# Altium PCB SD171-5.0PCB4.PcbDoc (part 1 of 5)
Units mm, origin at the board's own origin, x right, y up, seen from the top; angles counter-clockwise.
Board outline 152.27 x 99.6 mm, 6 copper layers (Top Layer, InternalPlane1, Mid-Layer 1, Mid-Layer 2, InternalPlane2, Bottom Layer); 398 components, 338 nets, 1867 pads, 652 vias.
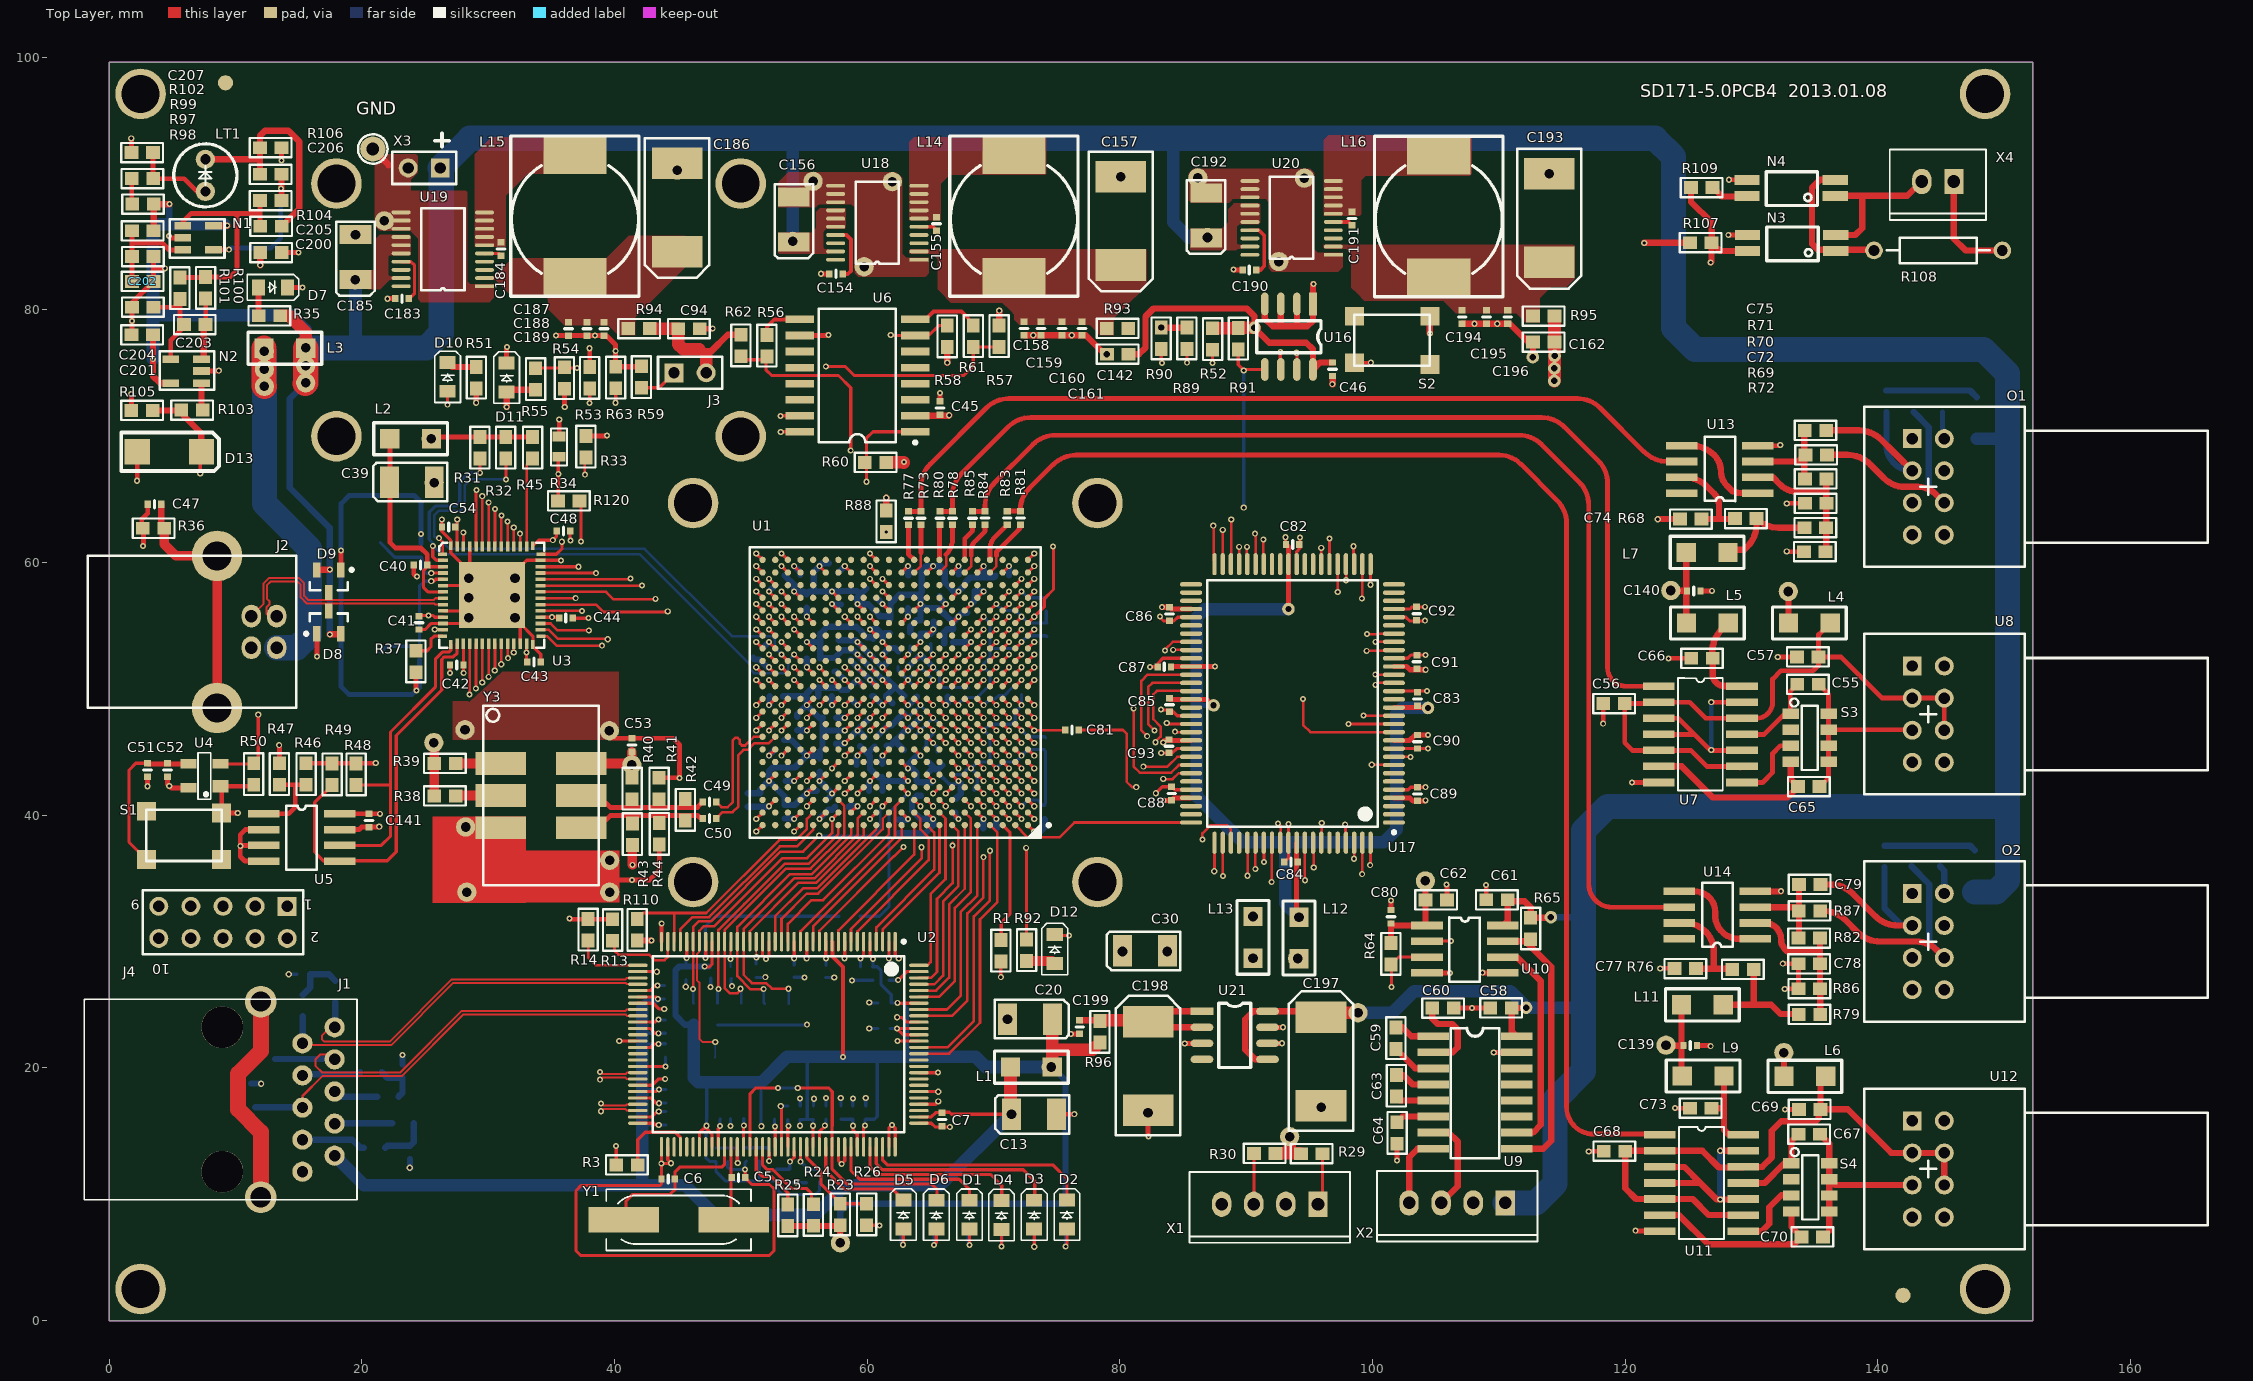
[diagram p0: Top Layer view]
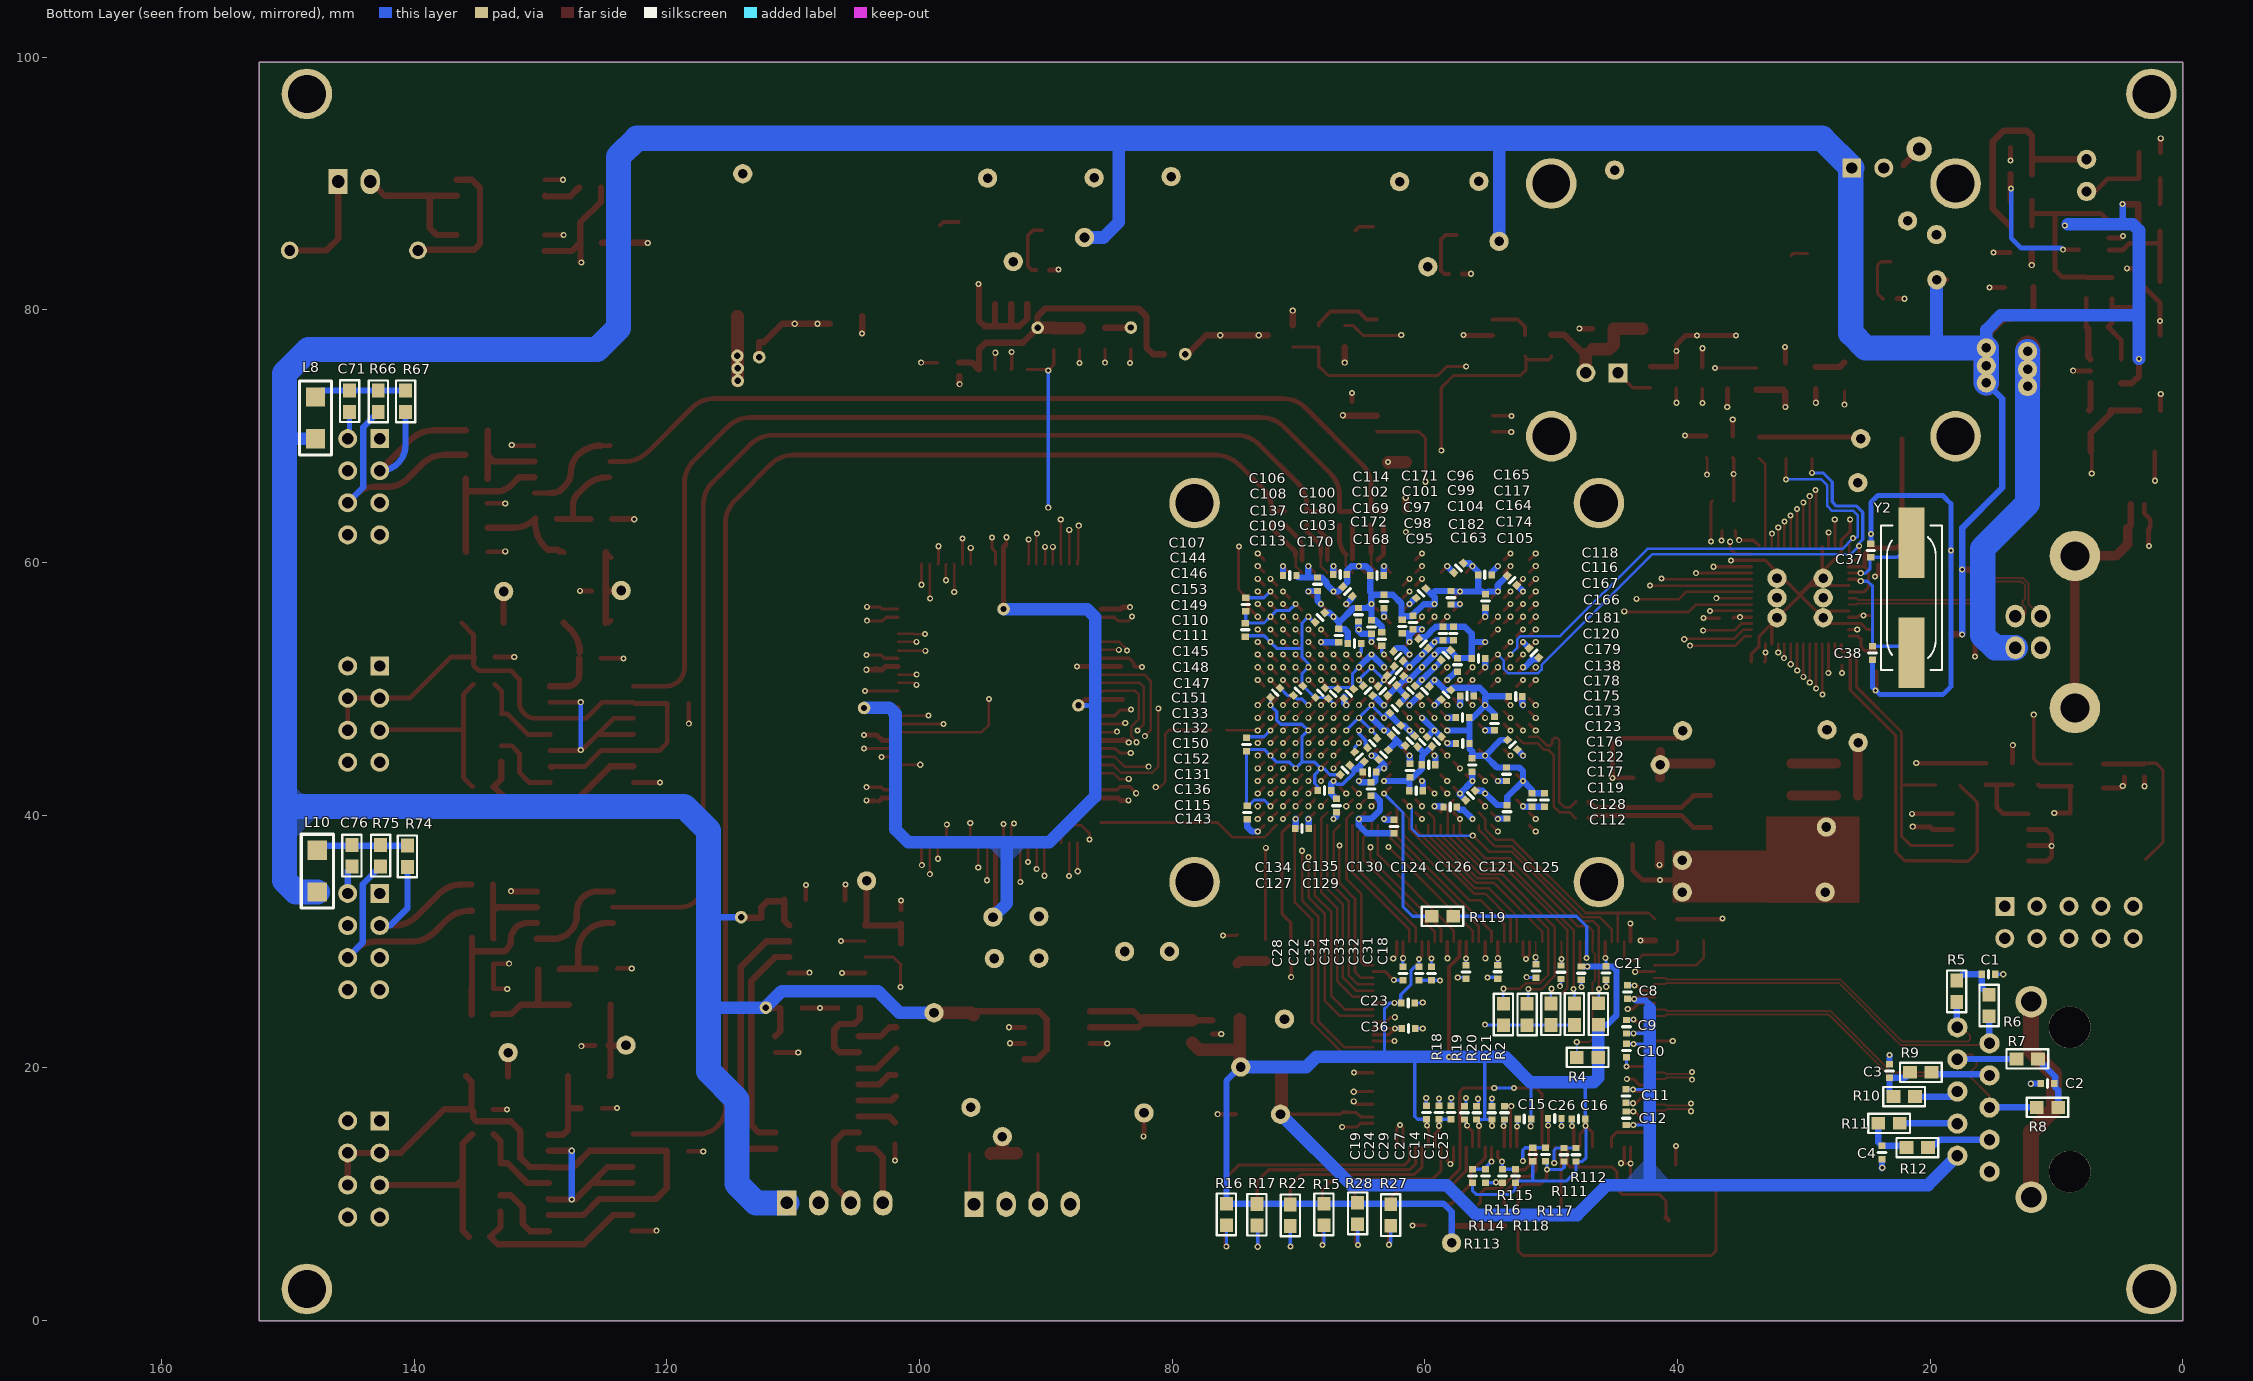
[diagram p1: Bottom Layer view, seen from below]
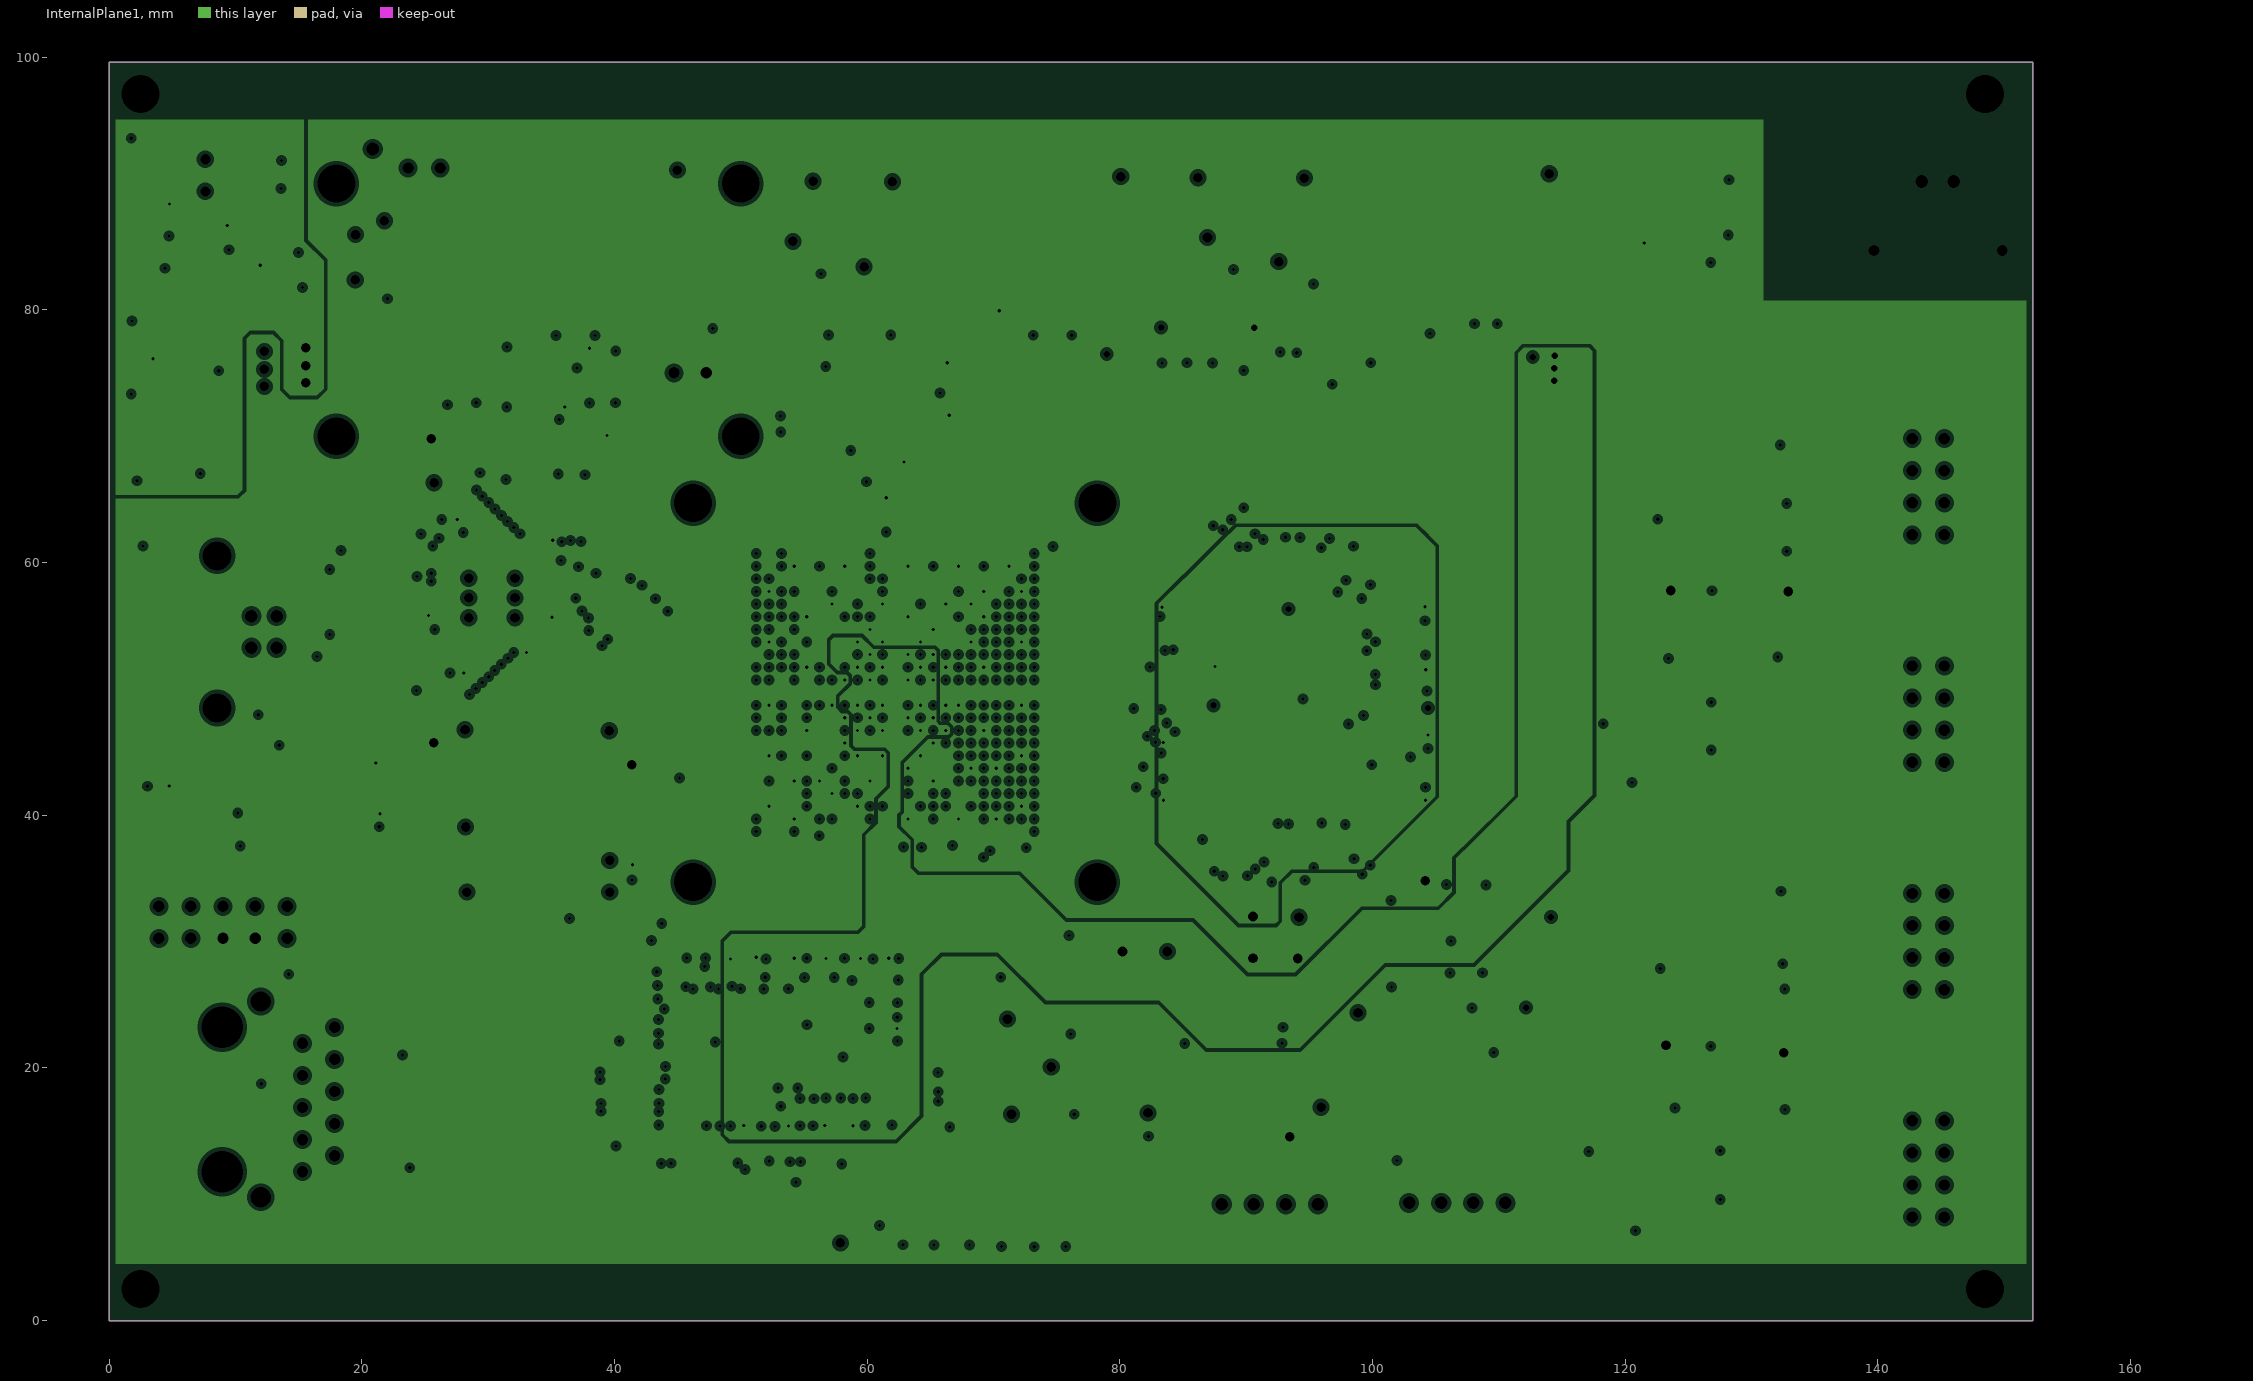
[diagram p2: InternalPlane1, clearances drawn from the general rule]
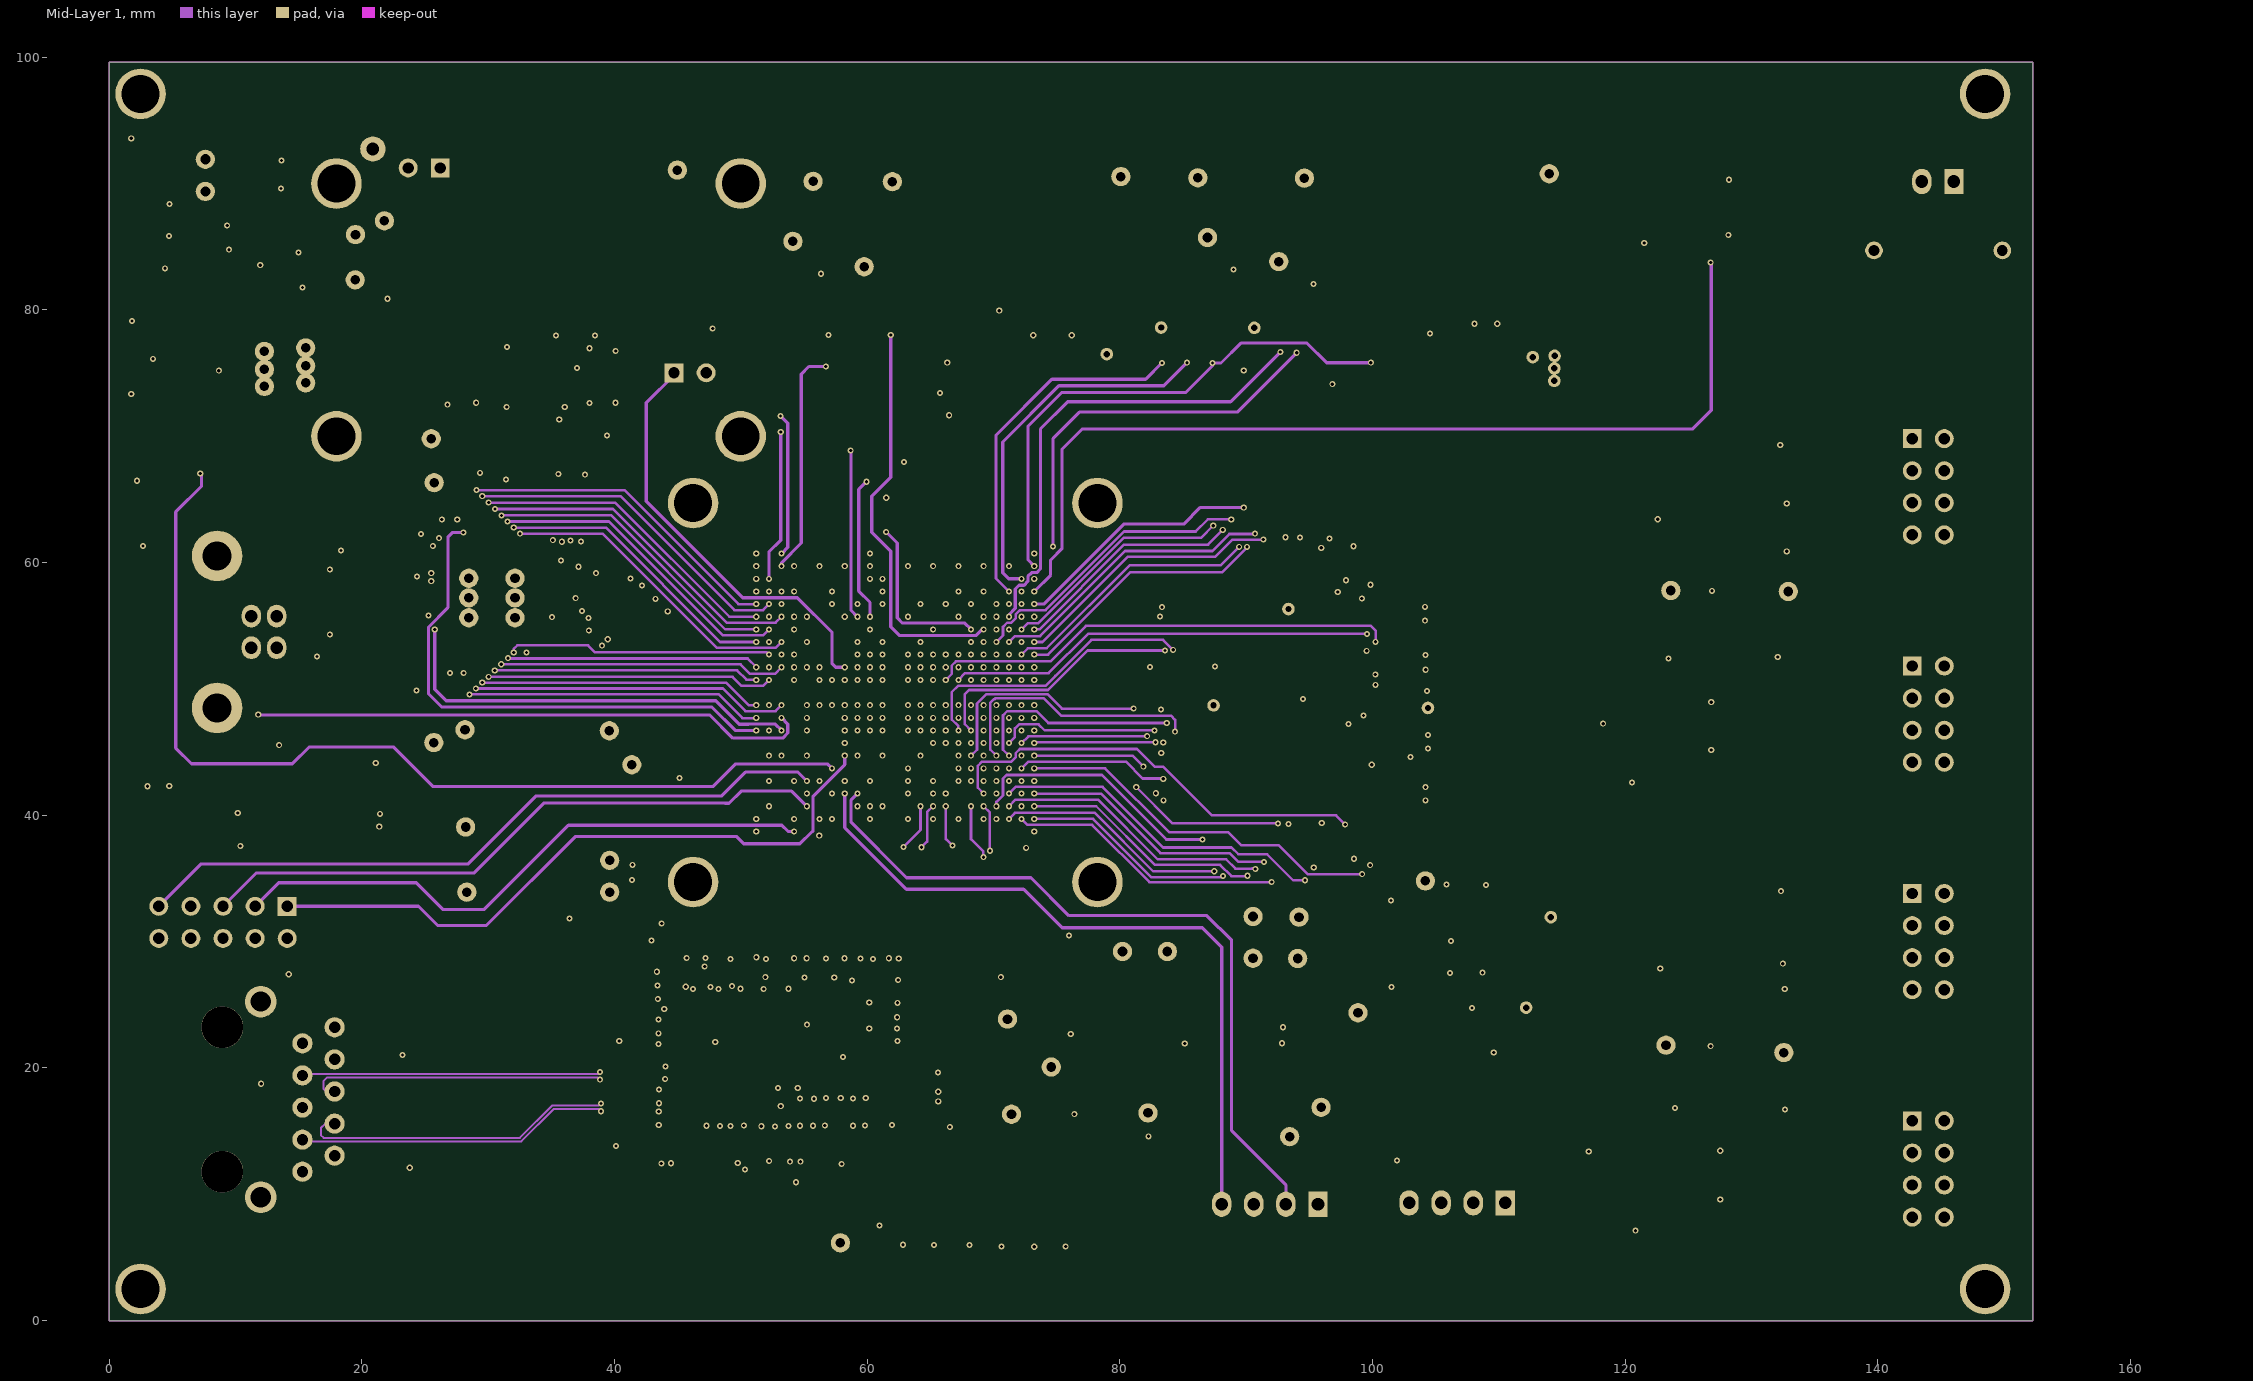
[diagram p3: Mid-Layer 1]
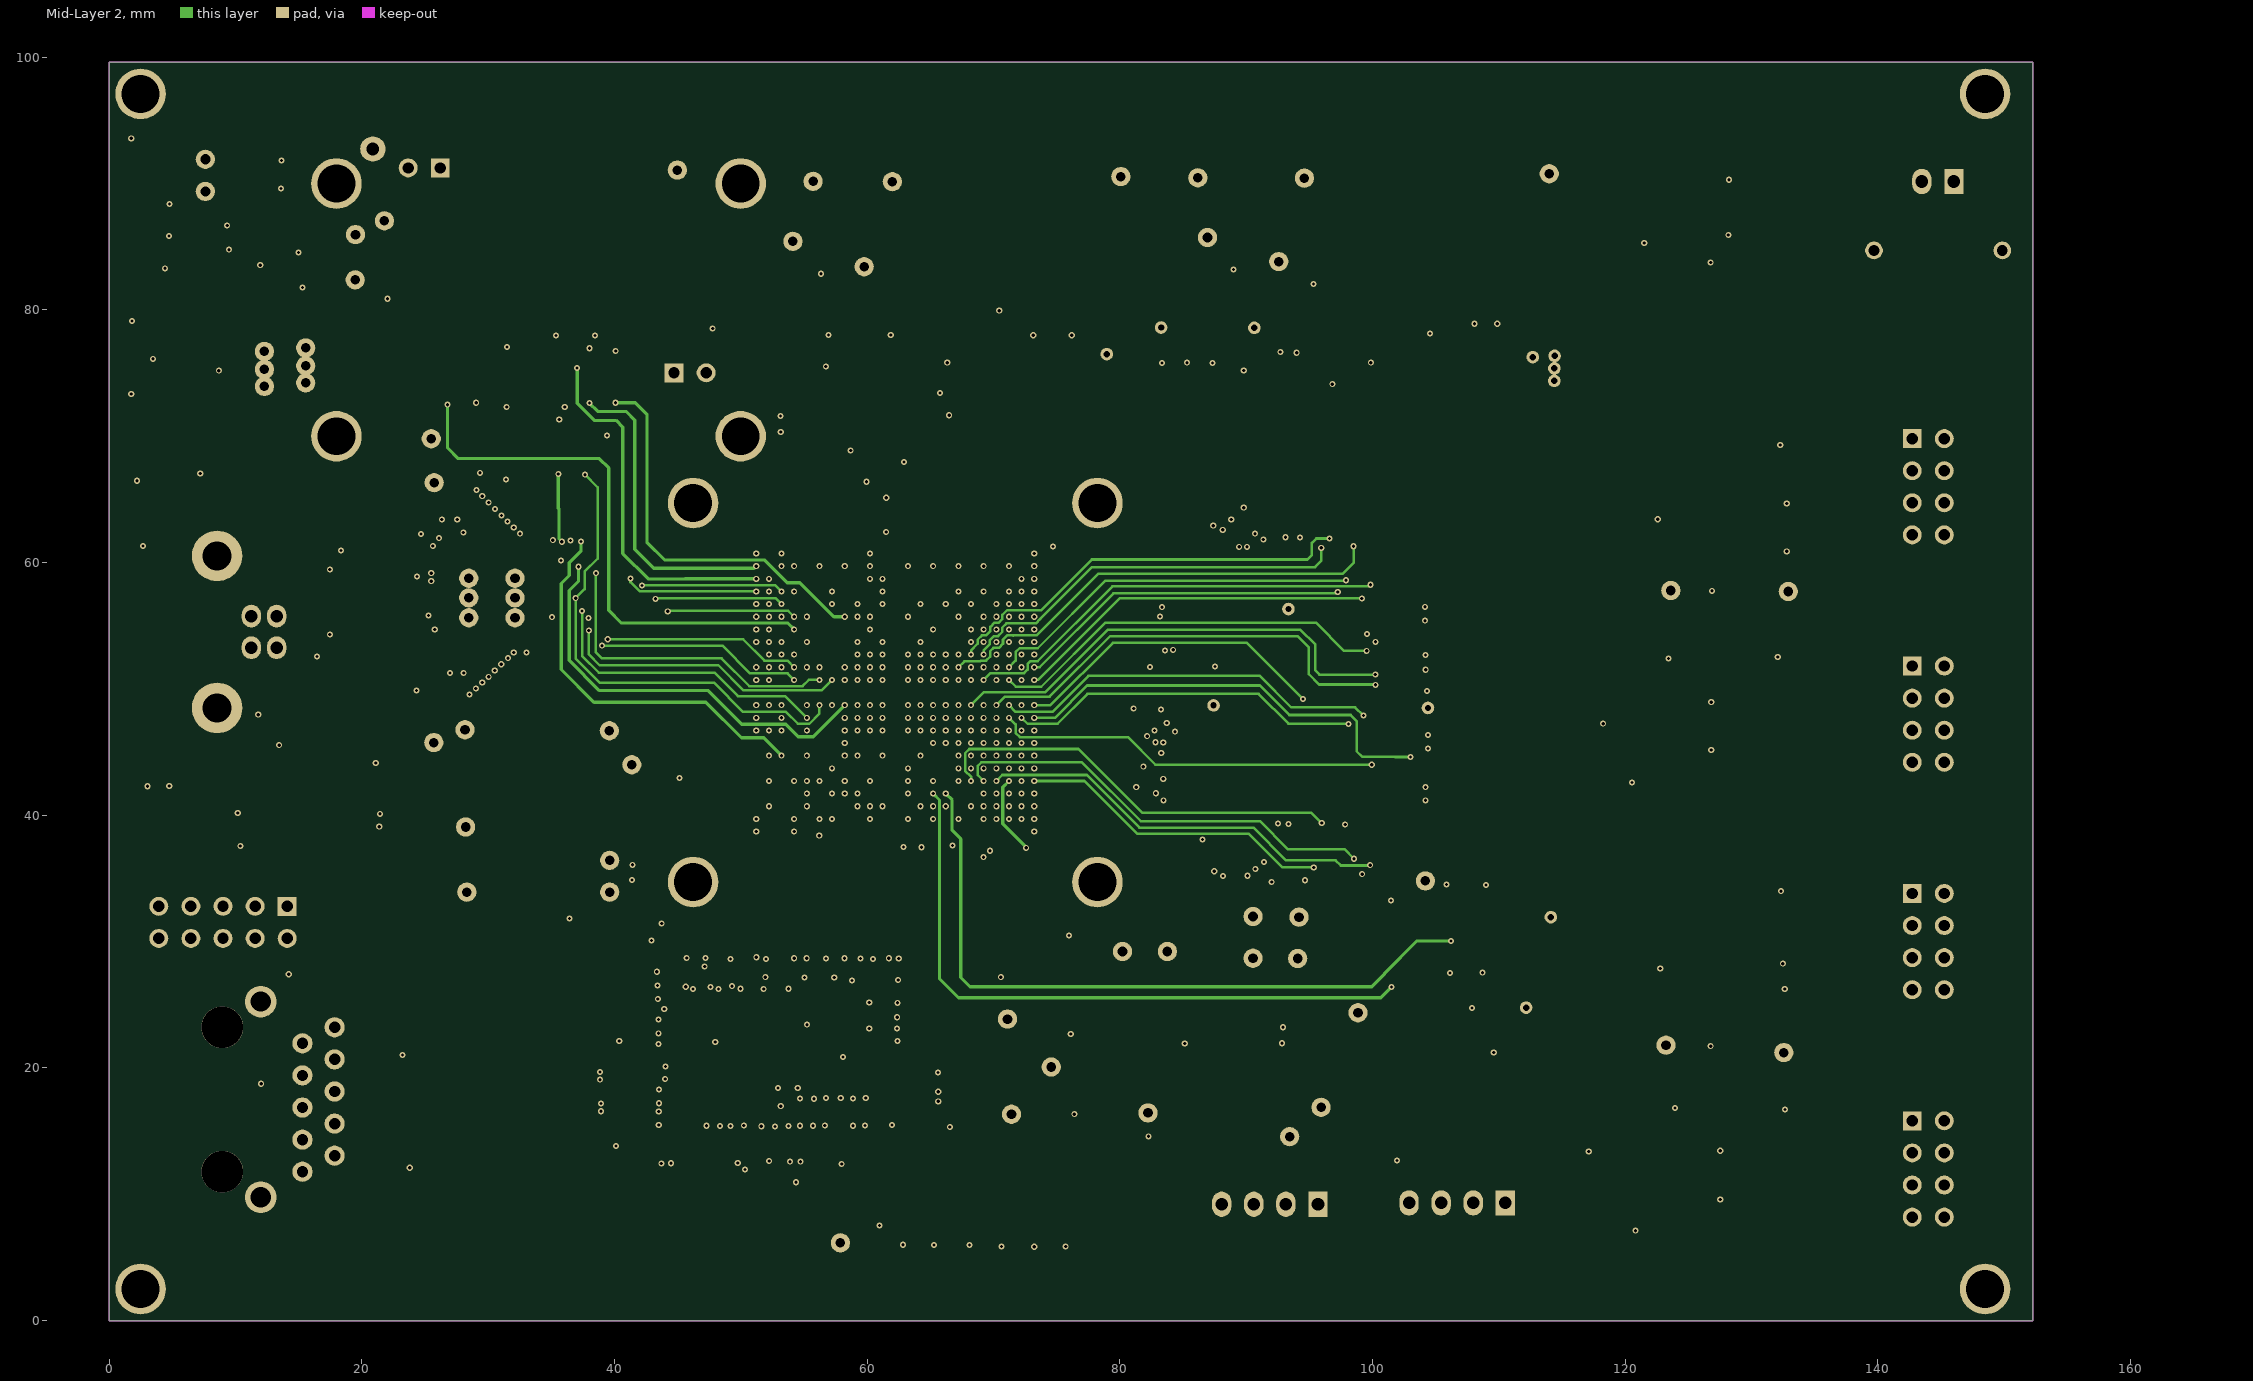
[diagram p4: Mid-Layer 2]
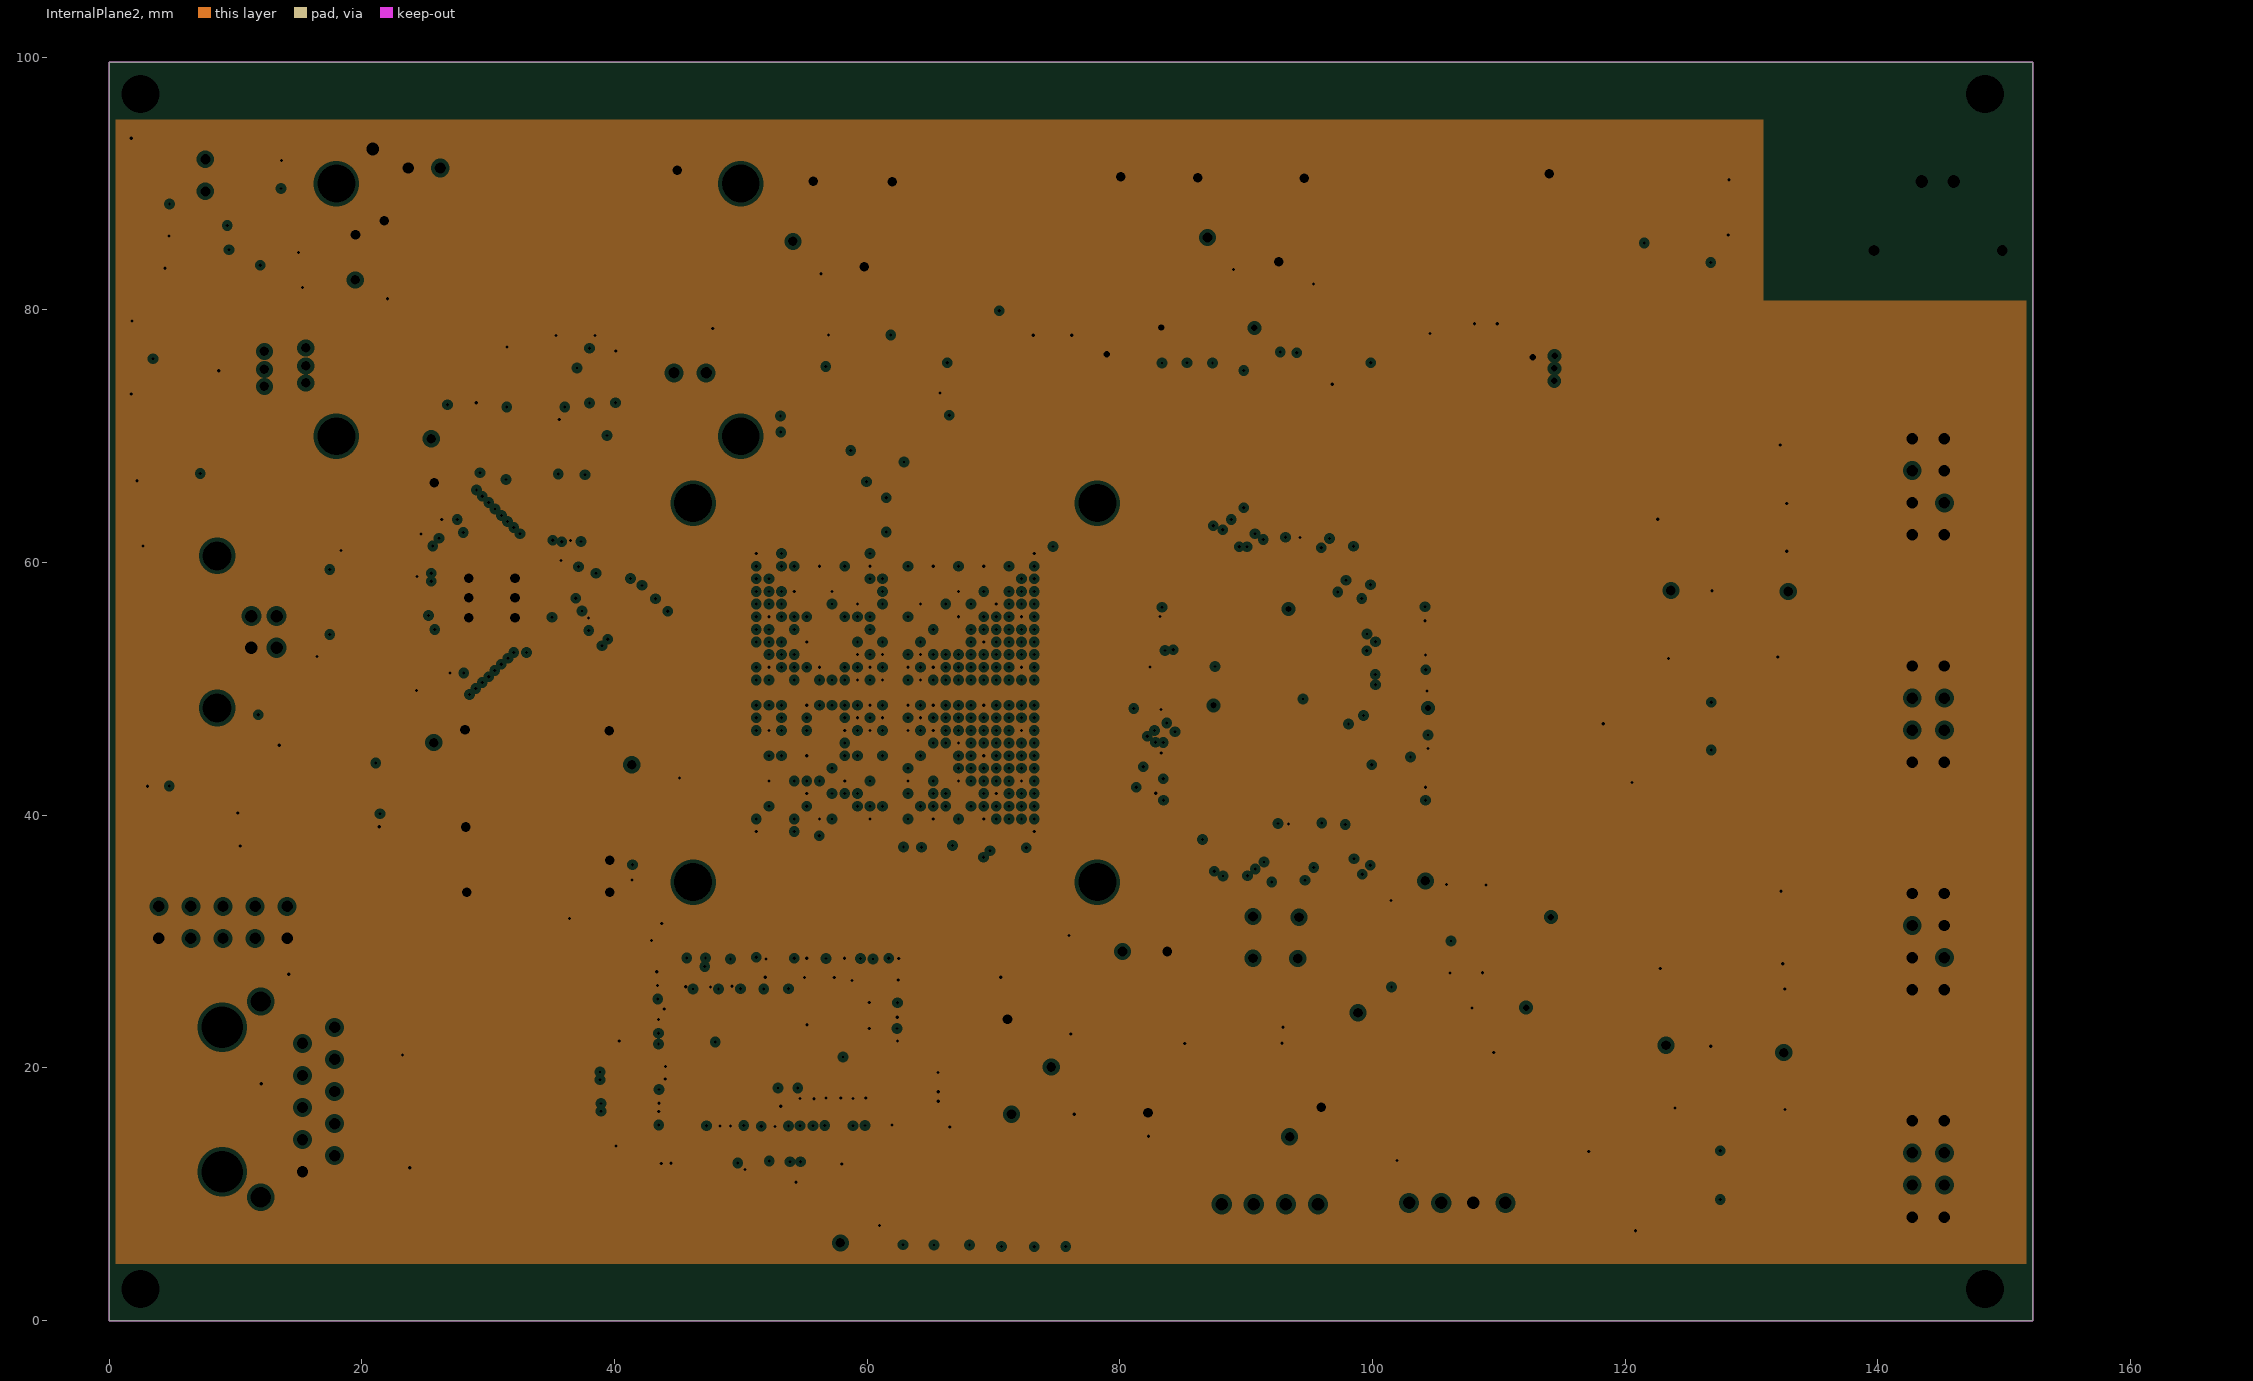
[diagram p5: InternalPlane2, clearances drawn from the general rule]

## Layer stack, top to bottom
Top Layer: signal copper 0.0356
Dielectric: prepreg 0.32, FR-4, Dk 4.8
InternalPlane1: plane copper 0.0356, net (Multiple Nets)
Dielectric: core 0.32, FR-4, Dk 4.8
Mid-Layer 1: signal copper 0.0356
Dielectric: prepreg 0.32, FR-4, Dk 4.8
Mid-Layer 2: signal copper 0.0356
Dielectric: core 0.32, FR-4, Dk 4.8
InternalPlane2: plane copper 0.0356, net GND
Dielectric: prepreg 0.32, FR-4, Dk 4.8
Bottom Layer: signal copper 0.0356

## Board outline
0,0 0,99.6 152.273,99.6 152.273,0 0,0

## Design rules (kind name [scope] priority, off if disabled: settings)
Clearance [All] p1: gap=0.127
DiffPairsRouting [All] p1: maxlimit=0.127 minlimit=0.127 mostfreqgap=0.127 maxuncoupledlength=12.7
FanoutControl Fanout_Default [All] p5: bgadir=NW bgaviamode=Centered fanoutstyle=Auto fanoutdirection=Alternating viagrid=0.025 // Fanout_Default (Default Rule)
Length "InNet('DDR2_DQ15') Or InNet('DDR2_DQ10')" [InNet('DDR2_DQ15') Or InNet('DDR2_DQ10')] p1: maxlimit=31.884 minlimit=0
Length "InNet('DDR2_DQ15') Or InNet('DDR2_LDQS_P')" [InNet('DDR2_DQ15') Or InNet('DDR2_LDQS_P')] p2: maxlimit=32.663 minlimit=0
MatchedLengths DiffPair_MatchedLengths [InDifferentialPair ('DDR2_UDQS')] p1: tolerance=25.4 checknetsindiffpair=TRUE checkdiffpairvsdiffpair=TRUE checkothers=TRUE
MatchedLengths DiffPair_MatchedLengths_1 [InDifferentialPair ('DDR2_CLK')] p2: tolerance=25.4 checknetsindiffpair=TRUE checkdiffpairvsdiffpair=TRUE checkothers=TRUE
MatchedLengths DiffPair_MatchedLengths_1_1 [InDifferentialPair ('TD3')] p3: tolerance=25.4 checknetsindiffpair=TRUE checkdiffpairvsdiffpair=TRUE checkothers=TRUE
MatchedLengths DiffPair_MatchedLengths_2 [InDifferentialPair ('TD2')] p4: tolerance=25.4 checknetsindiffpair=TRUE checkdiffpairvsdiffpair=TRUE checkothers=TRUE
MatchedLengths DiffPair_MatchedLengths_3 [InDifferentialPair ('TD1')] p5: tolerance=25.4 checknetsindiffpair=TRUE checkdiffpairvsdiffpair=TRUE checkothers=TRUE
MatchedLengths DiffPair_MatchedLengths_4 [InDifferentialPair ('TD0')] p6: tolerance=25.4 checknetsindiffpair=TRUE checkdiffpairvsdiffpair=TRUE checkothers=TRUE
MatchedLengths DiffPair_MatchedLengths_5 [InDifferentialPair ('D1')] p7: tolerance=25.4 checknetsindiffpair=TRUE checkdiffpairvsdiffpair=TRUE checkothers=TRUE
MatchedLengths DiffPair_MatchedLengths_6 [InDifferentialPair ('D1')] p8: tolerance=25.4 checknetsindiffpair=TRUE checkdiffpairvsdiffpair=TRUE checkothers=TRUE
MatchedLengths DiffPair_MatchedLengths_7 [InDifferentialPair ('DDR2_LDQS')] p9: tolerance=25.4 checknetsindiffpair=TRUE checkdiffpairvsdiffpair=TRUE checkothers=TRUE
MatchedLengths DiffPair_MatchedLengths_6_1 [InDifferentialPair ('DDR2_CLK')] p10: tolerance=25.4 checknetsindiffpair=TRUE checkdiffpairvsdiffpair=TRUE checkothers=TRUE
MatchedLengths DiffPair_MatchedLengths_5_1 [InDifferentialPair ('DDR2_CLK')] p11: tolerance=25.4 checknetsindiffpair=TRUE checkdiffpairvsdiffpair=TRUE checkothers=TRUE
MatchedLengths DiffPair_MatchedLengths_1_1_1 [InDifferentialPair ('DDR2_CLK')] p12: tolerance=25.4 checknetsindiffpair=TRUE checkdiffpairvsdiffpair=TRUE checkothers=TRUE
MatchedLengths DiffPair_MatchedLengths_2_1 [InDifferentialPair ('DDR2_LDQS')] p13: tolerance=25.4 checknetsindiffpair=TRUE checkdiffpairvsdiffpair=TRUE checkothers=TRUE
MatchedLengths DiffPair_MatchedLengths_3_1 [InDifferentialPair ('DDR2_CLK')] p14: tolerance=25.4 checknetsindiffpair=TRUE checkdiffpairvsdiffpair=TRUE checkothers=TRUE
MatchedLengths DiffPair_MatchedLengths_4_1 [InDifferentialPair ('TD0')] p15: tolerance=25.4 checknetsindiffpair=TRUE checkdiffpairvsdiffpair=TRUE checkothers=TRUE
MaxMinImpedance [All] p1: minimum=1.000 maximum=10.00
PlaneClearance [All] p1: clearance=0.3
PlaneConnect [All] p1: planeconnectstyle=Direct reliefexpansion=0.508 reliefentries=4 reliefconductorwidth=0.762 reliefairgap=0.254
PolygonConnect [All] p1: connectstyle=Direct reliefconductorwidth=0.254 reliefentries=4 polygonreliefangle="90 Angle"
RoutingVias [All] p1: holewidth=0.254 width=0.483 viastyle="Through Hole" minholewidth=0.254 minwidth=0.483 maxholewidth=0.254 maxwidth=0.483
SignalStimulus [All] p1: kind=1 level=0 starttime=5.000n stoptime=10.00n periodtime=10.00n
SilkscreenOverComponentPads [All] p1: minsilkscreentomaskgap=0.254
SolderMaskExpansion [All] p1: expansion=0.102
SupplyNets SupplyNets_5 [InNet('GND')] p1: voltage=0.000
SupplyNets SupplyNets_4 [InNet('VCC1V2')] p2: voltage=1.200
SupplyNets SupplyNets_3 [InNet('VCC1V8')] p3: voltage=1.800
SupplyNets SupplyNets_2 [InNet('VCC3V3')] p4: voltage=3.300
SupplyNets SupplyNets_1 [InNet('VCC5V')] p5: voltage=5.000
SupplyNets [InNet('VCC2V5')] p6: voltage=2.500
Width [All] p1: maxlimit=12.7 minlimit=0.127 preferedwidth=0.254
23 further rules are at their usual default settings.

## Classes and differential pairs
net class BNAK3: A0 A1 A2 A3 A4 A5 A6 A7 A8 A9 A10 A11 A12 A13 A14 A15 A16 A17 A18 ADV B4NC1 B4NC2 B4NC3 B4NC4 B4NC5 B4NC7 B4NC8 B4NC9 B4NC10 B4NC11 B4NC12 B4NC13 B4NC14 B4NC15 B4NC16 B4NC17 B4NC18 B4NC19 B4NC20 B4NC21 B4NC22 B4NC23 B4NC24 B4NC25 B4NC26 B4NC27 B4NC29 BA# BB# CK CKE# DA0 DA1 DA2 DA3 DA4 DA5 DA6 DA7 DA8 DB0 DB1 DB2 DB3 DB4 DB5 DB6 DB7 DB8 E1# E2 E3# EPSCLK EPSDA EPWP FJDQ1A FJDQ1B FJDQ2A FJDQ2B FPGA_ONCHIP_TERM1 FPGA_ONCHIP_TERM2 FT# G# GND LBO# NetD12_1 NetR92_1 TONGBU_E URXD W# ZZ
component class Sheet6: C200 C201 C202 C203 C204 C205 C206 C207 D13 LT1 N1 N2 N3 N4 R97 R98 R99 R100 R101 R102 R103 R104 R105 R106 R107 R108 R109 X4
component class Sheet1: C1 C2 C3 C4 C5 C6 C7 C8 C9 C10 C11 C12 C13 C14 C15 C16 C17 C18 C19 C20 C21 C22 C23 C24 C25 C26 C27 C28 C29 C30 C31 C32 C33 C34 C35 C36 D1 D2 D3 D4 D5 D6 D14 D15 D16 D17 D18 J1 L1 R1 R2 R3 R4 R5 R6 R7 R8 R9 R10 R11 R12 R13 R14 R15 R16 R17 R18 R19 R20 R21 R22 R23 R24 R25 R26 R27 R28 R29 R30 R110 R111 R112 R113 R114 R115 R116 R117 R118 R119 U1 U2 X1 Y1
component class Sheet2: C37 C38 C39 C40 C41 C42 C43 C44 C45 C46 C47 C48 C49 C50 C51 C52 C53 C219 C227 C228 C229 C230 C231 C232 D7 D8 D9 D10 J2 L2 L3 R31 R32 R33 R34 R35 R36 R37 R38 R39 R40 R41 R42 R43 R44 R45 R46 R47 R48 R49 R50 R51 R120 S1 U3 U4 U5 U23 Y2 Y3
component class Sheet3: C54 C55 C56 C57 C58 C59 C60 C61 C62 C63 C64 C65 C66 C67 C68 C69 C70 C71 C72 C73 C74 C75 C76 C77 C78 C79 C214 C215 C220 C221 C222 C223 C224 C225 C226 D11 J3 J4 L4 L5 L6 L7 L8 L9 L10 L11 O1 O2 R52 R53 R54 R55 R56 R57 R58 R59 R60 R61 R62 R63 R64 R65 R66 R67 R68 R69 R70 R71 R72 R73 R74 R75 R76 R77 R78 R79 R80 R81 R82 R83 R84 R85 R86 R87 R88 S2 S3 S4 U6 U7 U8 U9 U10 U11 U12 U13 U14 U22 X2
component class Sheet4: C80 C81 C82 C83 C84 C85 C86 C87 C88 C89 C90 C91 C92 C93 C218 D12 L12 L13 R89 R90 R91 R92 U16 U17
component class Sheet5: C94 C95 C96 C97 C98 C99 C100 C101 C102 C103 C104 C105 C106 C107 C108 C109 C110 C111 C112 C113 C114 C115 C116 C117 C118 C119 C120 C121 C122 C123 C124 C125 C126 C127 C128 C129 C130 C131 C132 C133 C134 C135 C136 C137 C138 C139 C140 C141 C142 C143 C144 C145 C146 C147 C148 C149 C150 C151 C152 C153 C154 C155 C156 C157 C158 C159 C160 C161 C162 C163 C164 C165 C166 C167 C168 C169 C170 C171 C172 C173 C174 C175 C176 C177 C178 C179 C180 C181 C182 C183 C184 C185 C186 C187 C188 C189 C190 C191 C192 C193 C194 C195 C196 C197 C198 C199 C208 C209 C210 C211 C212 C213 C216 C217 L14 L15 L16 R93 R94 R95 R96 U18 U19 U20 U21 X3
differential pair TD3: +TD3_P -TD3_N
differential pair TD2: +TD2_P -TD2_N
differential pair TD1: +TD1_P -TD1_N
differential pair TD0: +TD0_P -TD0_N
differential pair D1: +D1_P -D1_N

## Components (designator, comment, footprint, x,y, rotation, side; value= is the part's Value field where it differs from the comment)
C1 "220" 0402 14.877,27.411 r0 bottom
C2 "220" 0402 11.259,18.766 r180 bottom
C3 "220" 0402 23.226,20.285 r270 bottom
C4 "220" 0402 23.821,12.769 r90 bottom
C5 "220" 0402 50.346,11.307 r180 top
C6 "220" 0402 43.736,11.197 r0 top
C7 "104" 0402 65.943,15.389 r90 top
C8 "104" 0402 43.972,26.525 r270 bottom
C9 "104" 0402 44.048,23.782 r270 bottom
C10 "104" 0402 44.047,20.848 r90 bottom
C11 "104" 0402 44.072,17.241 r90 bottom
C12 "104" 0402 44.066,16.541 r270 bottom
C13 "10UF/20V" CAP-B 73.08,16.329 r180 top
C14 "104" 0402 55.902,16.973 r270 bottom
C15 "104" 0402 52.659,15.962 r180 bottom
C16 "104" 0402 48.366,15.962 r180 bottom
C17 "104" 0402 54.709,16.973 r270 bottom
C18 "104" 0402 47.628,26.969 r90 bottom
C19 "104" 0402 59.89,16.998 r270 bottom
C20 "10UF/20V" CAP-B 73.027,23.862 r0 top
C21 "104" 0402 45.672,26.994 r90 bottom
C22 "104" 0402 60.455,26.944 r90 bottom
C23 "104" 0402 60.802,25.143 r0 bottom
C24 "104" 0402 58.874,16.998 r270 bottom
C25 "104" 0402 53.718,16.973 r270 bottom
C26 "104" 0402 49.201,16 r0 bottom
C27 "104" 0402 56.868,16.973 r270 bottom
C28 "104" 0402 61.75,26.944 r90 bottom
C29 "104" 0402 57.934,16.998 r270 bottom
C30 "10UF/20V" CAP-B 81.876,29.259 r180 top
C31 "104" 0402 49.228,27.045 r90 bottom
C32 "104" 0402 51.215,27.156 r90 bottom
C33 "104" 0402 54.238,27.079 r90 bottom
C34 "104" 0402 56.747,27.071 r90 bottom
C35 "104" 0402 59.49,26.944 r90 bottom
C36 "104" 0402 60.776,23.111 r0 bottom
C37 "220" 0402 24.711,61.474 r270 bottom
C38 "220" 0402 24.565,52.318 r90 bottom
C39 "10UF/20V" CAP-B 23.837,66.369 r180 top
C40 "104" 0402 24.133,59.821 r0 top
C41 "104" 0402 24.533,54.707 r90 top
C42 "104" 0402 26.996,51.895 r0 top
C43 "104" 0402 34.167,52.143 r180 top
C44 "104" 0402 36.682,55.598 r180 top
C45 "104" 0402 65.771,72.751 r270 top
C46 "104" 0402 96.855,74.775 r90 top
C47 "104" 0402 4.119,64.615 r180 top
C48 "104" 0402 35.439,62.511 r0 top
C49 "104" 0402 47.011,41.049 r0 top
C50 "104" 0402 47.011,39.754 r0 top
C51 "104" 0402 3.051,44.099 r270 top
C52 "104" 0402 4.62,43.049 r90 top
C53 "104" 0402 41.38,46.08 r270 top
C54 "104" 0402 26.361,62.817 r0 top
C55 "101" 0603 134.472,50.365 r180 top
C56 "104" 0603 119.13,48.841 r180 top
C57 "103" 0603 134.463,52.53 r0 top
C58 "104" 0603 110.181,24.743 r0 top
C59 "104" 0603 101.857,22.356 r270 top
C60 "104" 0603 105.592,24.737 r180 top
C61 "104" 0603 109.858,33.304 r180 top
C62 "104" 0603 105.05,33.302 r0 top
C63 "104" 0603 101.902,18.588 r90 top
C64 "104" 0603 101.953,14.855 r90 top
C65 "101" 0603 134.548,42.263 r180 top
C66 "104" 0603 126.09,52.423 r180 top
C67 "101" 0603 134.574,14.754 r180 top
C68 "104" 0603 119.156,13.408 r180 top
C69 "103" 0603 134.616,16.716 r0 top
C70 "101" 0603 134.828,6.626 r180 top
C71 "104" 0603 145.121,72.777 r270 bottom
C72 "332" 0603 135.082,64.691 r180 top
C73 "104" 0603 125.988,16.812 r180 top
C74 "104" 0603 125.201,63.446 r180 top
C75 "332" 0603 135.073,70.463 r0 top
C76 "104" 0603 144.929,36.8 r270 bottom
C77 "104" 0603 124.769,27.861 r180 top
C78 "332" 0603 134.574,28.242 r180 top
C79 "332" 0603 134.616,34.522 r0 top
C80 "104" 0402 101.47,31.441 r90 top
C81 "104" 0402 75.694,46.748 r0 top
C82 "104" 0402 94.219,61.423 r180 top
C83 "104" 0402 103.565,49.721 r270 top
C84 "104" 0402 93.042,36.283 r0 top
C85 "104" 0402 83.925,48.214 r90 top
C86 "104" 0402 83.925,55.402 r90 top
C87 "104" 0402 83.001,51.75 r0 top
C88 "104" 0402 84.115,42.247 r270 top
C89 "104" 0402 103.565,42.203 r270 top
C90 "104" 0402 103.559,45.293 r90 top
C91 "104" 0402 103.514,52.667 r270 top
C92 "104" 0402 103.508,55.427 r90 top
C93 "104" 0402 83.899,44.937 r90 top
C94 "226" 0603 45.902,78.508 r180 top
C95 "104" 0402 55.784,59.033 r180 bottom
C96 "104" 0402 53.481,58.964 r225 bottom
C97 "104" 0402 57.934,57.74 r270 bottom
C98 "104" 0402 55.217,57.486 r270 bottom
C99 "104" 0402 50.998,52.475 r45 bottom
C100 "104" 0402 59.938,57.939 r315 bottom
C101 "104" 0402 56.966,59.946 r315 bottom
C102 "104" 0402 60.957,55.784 r270 bottom
C103 "104" 0402 61.795,55.454 r270 bottom
C104 "104" 0402 56.292,52.403 r180 bottom
C105 "104" 0402 57.426,52.431 r270 bottom
C106 "104" 0402 64.319,58.982 r180 bottom
C107 "104" 0402 70.174,58.976 r0 bottom
C108 "104" 0402 66.496,58.076 r225 bottom
C109 "104" 0402 65.275,56.394 r270 bottom
C110 "104" 0402 66.187,59.052 r0 bottom
C111 "104" 0402 68.501,58.807 r270 bottom
C112 "104" 0402 50.549,41.729 r270 bottom
C113 "104" 0402 66.824,54.743 r270 bottom
C114 "104" 0402 64.234,55.429 r270 bottom
C115 "104" 0402 65.653,49.989 r315 bottom
C116 "104" 0402 53.346,49.406 r180 bottom
C117 "104" 0402 56.154,49.425 r0 bottom
C118 "104" 0402 56.509,47.724 r0 bottom
C119 "104" 0402 54.48,47.783 r270 bottom
C120 "104" 0402 56.484,45.666 r0 bottom
C121 "104" 0402 60.229,43.996 r180 bottom
C122 "104" 0402 61.192,43.011 r90 bottom
C123 "104" 0402 53.443,45.955 r225 bottom
C124 "104" 0402 61.22,41.938 r180 bottom
C125 "104" 0402 56.258,44.507 r270 bottom
C126 "104" 0402 56.026,41.937 r315 bottom
C127 "104" 0402 53.489,40.798 r270 bottom
C128 "104" 0402 51.534,41.738 r270 bottom
C129 "104" 0402 53.54,43.77 r270 bottom
C130 "104" 0402 57.474,40.662 r0 bottom
C131 "104" 0402 62.462,38.577 r90 bottom
C132 "104" 0402 67.002,41.281 r270 bottom
C133 "104" 0402 69.209,38.961 r0 bottom
C134 "104" 0402 64.278,41.547 r90 bottom
C135 "104" 0402 64.91,43.438 r180 bottom
C136 "104" 0402 62.91,45.163 r315 bottom
C137 "104" 0402 63.243,57.435 r270 bottom
C138 "104" 0402 64.811,44.259 r45 bottom
C139 "104" 0402 125.684,21.765 r180 top
C140 "104" 0402 125.963,57.757 r180 top
C141 "104" 0402 20.571,39.061 r90 top
C142 "226" 0603 79.834,76.491 r0 top
C143 "104" 0402 70.415,49.478 r135 bottom
C144 "104" 0402 74.183,56.145 r90 bottom
C145 "104" 0402 67.937,56.028 r315 bottom
C146 "104" 0402 74.223,55.201 r270 bottom
C147 "104" 0402 67.914,50.065 r315 bottom
C148 "104" 0402 66.898,49.989 r315 bottom
C149 "104" 0402 74.122,46.134 r270 bottom
C150 "104" 0402 65.95,43.951 r315 bottom
C151 "104" 0402 74.068,39.702 r90 bottom
C152 "104" 0402 67.431,41.958 r0 bottom
C153 "104" 0402 71.482,50.069 r315 bottom
C154 "104" 0402 57.019,82.858 r0 top
C155 "473" 0402 65.508,87.337 r270 top
C156 "10UF/20V" CAP-B 54.207,87.025 r270 top
C157 "470UF/10V" CAP-D 80.089,87.05 r270 top
C158 "104" 0402 72.438,77.999 r90 top
C159 "104" 0402 73.784,77.999 r90 top
C160 "104" 0402 75.435,77.999 r90 top
C161 "102" 0402 77.01,77.999 r90 top
C162 "226" 0603 113.559,77.448 r0 top
C163 "104" 0402 58.569,54.921 r270 bottom
C164 "104" 0402 60.488,53.958 r225 bottom
C165 "104" 0402 57.967,53.045 r315 bottom
C166 "104" 0402 59.659,50.192 r315 bottom
C167 "104" 0402 62.486,52.965 r225 bottom
C168 "104" 0402 63.421,54.463 r270 bottom
C169 "104" 0402 66.097,53.597 r180 bottom
C170 "104" 0402 62.246,50.304 r45 bottom
C171 "104" 0402 62.962,49.465 r45 bottom
C172 "104" 0402 64.142,49.489 r45 bottom
C173 "104" 0402 57.957,49.913 r315 bottom
C174 "104" 0402 61.525,49.478 r135 bottom
C175 "104" 0402 59.442,45.464 r135 bottom
C176 "104" 0402 60.585,45.439 r135 bottom
C177 "104" 0402 61.551,45.516 r135 bottom
C178 "104" 0402 62.021,48.846 r315 bottom
C179 "104" 0402 64.547,45.337 r135 bottom
C180 "104" 0402 61.69,51.032 r45 bottom
C181 "104" 0402 62.657,46.348 r135 bottom
C182 "104" 0402 57.757,54.921 r270 bottom
C183 "104" 0402 22.658,80.885 r0 top
C184 "473" 0402 31.024,85.35 r270 top
C185 "10UF/20V" CAP-B 19.51,84.053 r270 top
C186 "470UF/10V" CAP-D 44.961,88.117 r270 top
C187 "104" 0402 36.37,77.974 r90 top
C188 "104" 0402 37.818,77.974 r90 top
C189 "104" 0402 39.164,77.974 r90 top
C190 "104" 0402 89.734,83.163 r0 top
C191 "473" 0402 98.385,87.763 r270 top
C192 "10UF/20V" CAP-B 86.846,87.355 r270 top
C193 "470UF/10V" CAP-D 113.998,87.279 r270 top
C194 "104" 0402 107.109,78.913 r90 top
C195 "104" 0402 109.039,78.913 r90 top
C196 "104" 0402 110.716,78.913 r90 top
C197 "470UF/10V" CAP-D 95.933,20.493 r90 top
C198 "470UF/10V" CAP-D 82.242,20.138 r90 top
C199 "104" 0402 76.832,22.703 r90 top
C200 "104" 0603 12.823,84.534 r0 top
C201 "104" 0603 2.621,78.026 r180 top
C202 "104" 0603 2.663,82.248 r0 top
C203 "103" 0603 6.786,78.839 r180 top
C204 "103" 0603 2.671,80.21 r180 top
C205 "105" 0603 12.823,86.617 r0 top
C206 "105" 0603 12.797,90.732 r0 top
C207 "104" 0603 2.621,92.453 r180 top
D1 "0805-LED" 0805LED 68.102,7.236 r90 top
D2 "0805-LED" 0805LED 75.823,7.261 r90 top
D3 "0805-LED" 0805LED 73.233,7.236 r90 top
D4 "0805-LED" 0805LED 70.642,7.211 r90 top
D5 "0805-LED" 0805LED 62.869,7.261 r90 top
D6 "0805-LED" 0805LED 65.486,7.236 r90 top
D7 "LED0" 0805LED 11.833,81.784 r0 top
D8 "BAT54S-SOT23" SOT23-3L 17.403,55.267 r90 top
D9 "BAT54S-SOT23" SOT23-3L 17.404,58.525 r270 top
D10 "LED0805" 0805LED 26.801,73.555 r90 top
D11 "LED(绿)" 0805LED 31.475,73.505 r90 top
D12 "红色 LED" 0805LED 74.858,28.267 r90 top
D13 "1N4728" M7 2.231,68.761 r0 top
J1 "HFJ11-1G01ERL" HFJ11-1G01ERL 8.962,17.504 r270 top
J2 "USB2.0" USB-B 8.555,60.531 r270 top
J3 "" HDR1X2 44.724,75.017 r0 top
J4 "FPGA_JTAG" HDR2X5 14.101,32.788 r180 top
L1 "10mH" 1206A 74.655,20.063 r180 top
L2 "磁珠" 1206A 22.228,69.804 r0 top
L3 "磁珠" 1206A 12.264,76.965 r0 top
L4 "磁珠" 1206A 132.939,55.223 r0 top
L5 "磁珠" 1206A 124.862,55.223 r0 top
L6 "磁珠" 1206A 132.584,19.332 r0 top
L7 "磁珠" 1206A 128.147,60.805 r180 top
L8 "磁珠" 1206A 147.825,73.097 r270 bottom
L9 "磁珠" 1206A 124.532,19.358 r0 top
L10 "磁珠" 1206A 147.673,37.232 r270 bottom
L11 "磁珠" 1206A 127.766,24.991 r180 top
L12 "10uH" 1206A 94.186,31.932 r270 top
L13 "10uH" 1206A 90.554,31.983 r270 top
L14 "5.6uH" L5R2 76.705,81.072 r90 top
L15 "5.6uH" L5R2 41.958,81.072 r90 top
L16 "5.6uH" L5R2 110.335,81.047 r90 top
LT1 "SFH203" LED5 7.624,89.38 r90 top
N1 "AD8541_1" SOT-23-5 6.092,86.668 r270 top
N2 "LMV7219M5" SOT-23-5 7.066,74.19 r90 top
N3 "TLP281-1(SOC4)" TLP821-1 136.682,84.655 r180 top
N4 "TLP281-1(SOC4)" TLP821-1 136.631,89.024 r180 top
O1 "HFBR-2416MZ/2412MZ" OPT 144,66 r90 top
O2 "HFBR-2416MZ/2412MZ" OPT 144,30 r90 top
R1 "101" 0603 70.591,29.283 r90 top
R2 "4751" 0603 46.274,24.26 r90 bottom
R3 "472" 0603 40.991,12.322 r0 top
R4 "4751" 0603 47.127,20.834 r0 bottom
R5 "470" 0603 17.911,26.057 r270 bottom
R6 "470" 0603 15.346,24.94 r270 bottom
R7 "470" 0603 12.322,20.705 r0 bottom
R8 "470" 0603 10.722,16.87 r0 bottom
R9 "470" 0603 20.749,19.655 r180 bottom
R10 "470" 0603 22.068,17.732 r180 bottom
R11 "470" 0603 23.263,15.617 r180 bottom
R12 "470" 0603 21.027,13.694 r180 bottom
R13 "472" 0603 39.856,30.916 r270 top
R14 "4991" 0603 37.925,30.942 r270 top
R15 "151" 0603 67.993,8.403 r270 bottom
R16 "151" 0603 75.714,8.403 r270 bottom
R17 "151" 0603 73.301,8.378 r270 bottom
R18 "472" 0603 53.794,24.227 r270 bottom
R19 "472" 0603 51.915,24.227 r270 bottom
R20 "472" 0603 50.035,24.253 r270 bottom
R21 "472" 0603 48.163,24.254 r270 bottom
R22 "151" 0603 70.66,8.327 r270 bottom
R23 "0" 0603 57.884,8.403 r90 top
R24 "0" 0603 55.756,8.361 r270 top
R25 "0" 0603 53.724,8.336 r270 top
R26 "0" 0603 59.966,8.403 r90 top
R27 "151" 0603 62.71,8.352 r270 bottom
R28 "151" 0603 65.326,8.479 r270 bottom
R29 "102" 0603 95.195,13.211 r0 top
R30 "102" 0603 91.47,13.23 r180 top
R31 "512" 0603 29.358,69.091 r270 top
R32 "512" 0603 31.397,69.092 r270 top
R33 "512" 0603 37.747,69.169 r270 top
R34 "105" 0603X 35.614,69.981 r270 top
R35 "103" 0603 12.696,79.53 r0 top
R36 "105" 0603 3.526,62.716 r0 top
R37 "103" 0603 24.285,52.176 r270 top
R38 "0" 0603 26.589,41.532 r0 top
R39 "0" 0603 26.589,44.097 r0 top
R40 "131" 0603 41.399,42.109 r90 top
R41 "820" 0603 43.54,42.11 r90 top
R42 "101" 0603 45.615,40.432 r90 top
R43 "131" 0603 41.424,38.502 r90 top
R44 "820" 0603 43.558,38.527 r90 top
R45 "103" 0603 33.531,69.092 r270 top
R46 "103" 0603 15.593,43.261 r90 top
R47 "103" 0603 13.484,43.261 r90 top
R48 "222" 0603 19.561,43.235 r270 top
R49 "222" 0603 17.656,43.235 r270 top
R50 "104" 0603 11.452,43.261 r90 top
R51 "27.4" 0603 29.068,74.631 r90 top
R52 "472" 0603 87.348,77.694 r90 top
R53 "472" 0603 38.046,74.621 r90 top
R54 "472" 0603 36.046,74.604 r270 top
R55 "511" 0603 33.76,74.528 r270 top
R56 "101" 0603 52.073,77.17 r270 top
R57 "102" 0603 70.457,77.923 r90 top
R58 "102" 0603 66.348,77.906 r270 top
R59 "472" 0603 42.142,74.68 r270 top
R60 "182" 0603 60.675,67.93 r0 top
R61 "101" 0603 68.407,77.924 r90 top
R62 "182" 0603 50.01,77.186 r90 top
R63 "0" 0603 40.104,74.646 r90 top
R64 "103" 0603 101.47,29.028 r90 top
R65 "103" 0603 112.519,31.034 r90 top
R66 "10R" 0603 142.847,72.767 r270 bottom
R67 "10R" 0603 140.688,72.767 r270 bottom
R68 "10R" 0603 129.561,63.478 r0 top
R69 "103" 0603 135.056,62.76 r180 top
R70 "222" 0603 135.082,66.621 r180 top
R71 "0R" 0603 135.125,68.525 r0 top
R72 "103" 0603 135.022,60.861 r0 top
R73 "33R1%" 0402 64.265,64.038 r270 top
R74 "10R" 0603 140.535,36.749 r270 bottom
R75 "10R" 0603 142.669,36.8 r270 bottom
R76 "10R" 0603 129.332,27.791 r0 top
R77 "33R1%" 0402 63.274,64.038 r270 top
R78 "33R1%" 0402 66.754,64.038 r270 top
R79 "103" 0603 134.599,24.229 r180 top
R80 "33R1%" 0402 65.764,64.038 r270 top
R81 "33R1%" 0402 72.132,64.063 r270 top
R82 "222" 0603 134.574,30.274 r180 top
R83 "33R1%" 0402 71.098,64.063 r270 top
R84 "33R1%" 0402 69.345,64.063 r270 top
R85 "33R1%" 0402 68.354,64.038 r270 top
R86 "103" 0603 134.59,26.267 r0 top
R87 "0R" 0603 134.599,32.433 r180 top
R88 "472" 0603 61.516,63.267 r90 top
R89 "100R" 0603 85.316,77.745 r90 top
R90 "DNP" 0603 83.284,77.745 r90 top
R91 "10K" 0603 89.387,77.721 r90 top
R92 "103" 0603 72.622,29.316 r270 top
R93 "0" 0603 79.828,78.54 r0 top
R94 "0" 0603 41.956,78.514 r0 top
R95 "0" 0603 113.559,79.505 r0 top
R96 "0" 0603 78.432,22.856 r90 top
R97 "512" 0603 2.663,86.261 r0 top
R98 "512" 0603 2.671,84.223 r180 top
R99 "0" 0603 2.688,88.37 r0 top
R100 "204" 0603 7.648,81.742 r270 top
R101 "204" 0603 5.616,81.716 r270 top
R102 "153" 0603 2.646,90.396 r180 top
R103 "512" 0603 6.574,72.063 r0 top
R104 "512" 0603 12.797,88.649 r0 top
R105 "103" 0603 2.612,72.037 r0 top
R106 "214" 0603 12.797,92.84 r0 top
R107 "512" 0603 125.988,85.316 r180 top
R108 "214" AXIAL-0.4 144.784,84.706 r180 top
R109 "0" 0603 126.065,89.684 r180 top
R110 "472" 0603 41.805,30.933 r90 top
R111 "0" 0402 48.98,12.601 r90 bottom
R112 "0" 0402 48.04,12.601 r90 bottom
R113 "0" 0402 56.245,10.925 r90 bottom
R114 "0" 0402 55.203,10.925 r90 bottom
R115 "0" 0402 52.841,10.925 r90 bottom
R116 "0" 0402 53.857,10.925 r90 bottom
R117 "0" 0402 50.453,12.627 r90 bottom
R118 "0" 0402 51.469,12.627 r90 bottom
R119 "0" 0603 58.61,32.002 r0 bottom
R120 "103" 0603 36.394,64.875 r0 top
S1 "复位按键" RESETKEY 8.918,40.441 r180 top
S2 "复位按键" RESETKEY 98.574,75.561 r0 top
S3 "47R-0805-阻排" RNS001 134.616,46.129 r270 top
S4 "47R-0805--阻排" RNS001 134.666,10.544 r270 top
U1 "XC6SLX45-3FGG484I" FGG484 62.233,49.712 r180 top
U2 "M88E1111-B2-RCJ1-C000" SQFP50P1720X2320-128L 52.98,21.872 r270 top
U3 "CY7C68014A-56LFXC" LF56A_N 30.299,57.425 r0 top
U4 "IMP811REUS-T" SOT-143 8.818,42.288 r90 top
U5 "24LC64" SMD8XX 11.095,35.665 r0 top
U6 "M25P64-VMF" SOIC16 63.809,70.355 r90 top
U7 "SN74LVC00AD" SMD14X 122.654,50.211 r0 top
U8 "HFBR-1414MZ  TX" OPT 144,48 r90 top
U9 "MAX232A" SMD16XX 102.537,10.181 r0 top
U10 "ADUM1201" SMD8XX 103.17,26.825 r0 top
U11 "SN74LVC00AD" SMD14X 122.755,14.702 r0 top
U12 "HFBR-1414MZ   TX" OPT 144,12 r90 top
U13 "MAX997ESA" SMD8XX 131.653,69.949 r180 top
U14 "MAX997ESA" SMD8XX 131.449,34.668 r180 top
U16 "FM24CL04" so_8 95.296,80.47 r270 top
U17 "GS880Z18T-100" QFP65P1680X2280-100N 93.678,48.849 r180 top
U18 "TPS54314" SOP20 64.113,83.977 r180 top
U19 "TPS54316" SOP20 29.721,81.869 r180 top
U20 "TPS54312" SOP20 96.904,84.358 r180 top
U21 "LT1963ES8-2.5" so_8 86.509,24.481 r0 top
X1 "4PIN-2.54" SIP4X 95.712,9.217 r180 top
X2 "4PIN-2.54" SIP4X 110.545,9.319 r180 top
X3 "Header 2" HDR1X2 26.217,91.234 r180 top
X4 "Header 2" SIP2X 146.029,90.167 r180 top
Y1 "25.000MHz" CRYSTAL_2 49.433,7.973 r180 top
Y2 "24.000MHz" CRYSTAL_2 21.491,52.874 r90 bottom
Y3 "OCS7050(LVPECL)-3.3V-100M-20PPM" CCPD-940X-033 34.191,41.559 r270 top

## Footprints (in the part's own frame and the unit in brackets; to place one, negate y for a bottom-side part, rotate by r counter-clockwise, add the part's x,y. Pads: shape width x height; smd on the part's side, far side on the other; paste and mask are expansions set on the pad)
0402 [mil]
  rect 20x22 smd: 1(-0.3,-0.02) 2(41.7,-0.02)
  silkscreen extent 21,-12 21,12
0603 [mil]
  rect 43x40 smd: 1(-33.5,0) 2(33.5,0)
  silkscreen extent -65,-30 65,30
0603X [mm]
  rect 0.762x1 smd: 1(0,0) 2(1.6,0)
  silkscreen extent -0.64,-0.64 2.29,0.64
0805LED [mil]
  rect 40x50 smd: 1(0,0) 2(90,0)
  silkscreen extent -35,-40 125,40
1206A [mil]
  rect 60x60 smd: 1(0,0) 2(130,0)
  silkscreen extent -50,-50 180,50
AXIAL-0.4 [mm]
  round 1.4 hole 0.85: 1(-5.08,0) 2(5.08,0)
  silkscreen extent -4.06,-1.02 4.06,1.02
CAP-B [mm]
  rect 1.5x2.5 smd: 1(1.651,0) 2(-1.905,0)
  silkscreen extent -2.92,-1.52 2.92,1.52
CAP-D [mm]
  rect 2.5x4 smd: 1(3.5,0) 2(-3.5,0)
  silkscreen extent -5.46,-2.54 5.59,2.54
CCPD-940X-033 [mm]
  rect 1.8x4 smd: 1(-2.54,-3.2) 2(0,-3.2) 3(2.54,-3.2) 4(2.54,3.2) 5(0,3.2) 6(-2.54,3.2)
  silkscreen extent -7.1,-4.57 7.1,4.57
CRYSTAL_2 [mil]
  rect 220x80 smd: 1(0,0) 2(342.52,0)
  silkscreen extent -54,-95 397,95
FGG484 [mm] "BGA, 484-Leads, Body 23x23mm, Pitch 1mm"
  round 0.5 smd: A1(-10.5,10.5) A2(-9.5,10.5) A3(-8.5,10.5) A4(-7.5,10.5) A5(-6.5,10.5) A6(-5.5,10.5) A7(-4.5,10.5) A8(-3.5,10.5) A9(-2.5,10.5) A10(-1.5,10.5) A11(-0.5,10.5) A12(0.5,10.5) A13(1.5,10.5) A14(2.5,10.5) A15(3.5,10.5) A16(4.5,10.5) A17(5.5,10.5) A18(6.5,10.5) A19(7.5,10.5) A20(8.5,10.5) A21(9.5,10.5) A22(10.5,10.5) AA1(-10.5,-9.5) AA2(-9.5,-9.5) AA3(-8.5,-9.5) AA4(-7.5,-9.5) AA5(-6.5,-9.5) AA6(-5.5,-9.5) AA7(-4.5,-9.5) AA8(-3.5,-9.5) AA9(-2.5,-9.5) AA10(-1.5,-9.5) AA11(-0.5,-9.5) AA12(0.5,-9.5) AA13(1.5,-9.5) AA14(2.5,-9.5) AA15(3.5,-9.5) AA16(4.5,-9.5) AA17(5.5,-9.5) AA18(6.5,-9.5) AA19(7.5,-9.5) AA20(8.5,-9.5) AA21(9.5,-9.5) AA22(10.5,-9.5) AB1(-10.5,-10.5) AB2(-9.5,-10.5) AB3(-8.5,-10.5) AB4(-7.5,-10.5) AB5(-6.5,-10.5) AB6(-5.5,-10.5) AB7(-4.5,-10.5) AB8(-3.5,-10.5) AB9(-2.5,-10.5) AB10(-1.5,-10.5) AB11(-0.5,-10.5) AB12(0.5,-10.5) AB13(1.5,-10.5) AB14(2.5,-10.5) AB15(3.5,-10.5) AB16(4.5,-10.5) AB17(5.5,-10.5) AB18(6.5,-10.5) AB19(7.5,-10.5) AB20(8.5,-10.5) AB21(9.5,-10.5) AB22(10.5,-10.5) B1(-10.5,9.5) B2(-9.5,9.5) B3(-8.5,9.5) B4(-7.5,9.5) B5(-6.5,9.5) B6(-5.5,9.5) B7(-4.5,9.5) B8(-3.5,9.5) B9(-2.5,9.5) B10(-1.5,9.5) B11(-0.5,9.5) B12(0.5,9.5) B13(1.5,9.5) B14(2.5,9.5) B15(3.5,9.5) B16(4.5,9.5) B17(5.5,9.5) B18(6.5,9.5) B19(7.5,9.5) B20(8.5,9.5) B21(9.5,9.5) B22(10.5,9.5) C1(-10.5,8.5) C2(-9.5,8.5) C3(-8.5,8.5) C4(-7.5,8.5) C5(-6.5,8.5) C6(-5.5,8.5) C7(-4.5,8.5) C8(-3.5,8.5) C9(-2.5,8.5) C10(-1.5,8.5) C11(-0.5,8.5) C12(0.5,8.5) C13(1.5,8.5) C14(2.5,8.5) C15(3.5,8.5) C16(4.5,8.5) C17(5.5,8.5) C18(6.5,8.5) C19(7.5,8.5) C20(8.5,8.5) C21(9.5,8.5) C22(10.5,8.5) D1(-10.5,7.5) D2(-9.5,7.5) D3(-8.5,7.5) D4(-7.5,7.5) D5(-6.5,7.5) D6(-5.5,7.5) D7(-4.5,7.5) D8(-3.5,7.5) D9(-2.5,7.5) D10(-1.5,7.5) D11(-0.5,7.5) D12(0.5,7.5) D13(1.5,7.5) D14(2.5,7.5) D15(3.5,7.5) D16(4.5,7.5) D17(5.5,7.5) D18(6.5,7.5) D19(7.5,7.5) D20(8.5,7.5) D21(9.5,7.5) D22(10.5,7.5) E1(-10.5,6.5) E2(-9.5,6.5) E3(-8.5,6.5) E4(-7.5,6.5) E5(-6.5,6.5) E6(-5.5,6.5) E7(-4.5,6.5) E8(-3.5,6.5) E9(-2.5,6.5) E10(-1.5,6.5) E11(-0.5,6.5) E12(0.5,6.5) E13(1.5,6.5) E14(2.5,6.5) E15(3.5,6.5) E16(4.5,6.5) E17(5.5,6.5) E18(6.5,6.5) E19(7.5,6.5) E20(8.5,6.5) E21(9.5,6.5) E22(10.5,6.5) F1(-10.5,5.5) F2(-9.5,5.5) F3(-8.5,5.5) F4(-7.5,5.5) F5(-6.5,5.5) F6(-5.5,5.5) F7(-4.5,5.5) F8(-3.5,5.5) F9(-2.5,5.5) F10(-1.5,5.5) F11(-0.5,5.5) F12(0.5,5.5) F13(1.5,5.5) F14(2.5,5.5) F15(3.5,5.5) F16(4.5,5.5) F17(5.5,5.5) F18(6.5,5.5) F19(7.5,5.5) F20(8.5,5.5) F21(9.5,5.5) F22(10.5,5.5) G1(-10.5,4.5) G2(-9.5,4.5) G3(-8.5,4.5) G4(-7.5,4.5) G5(-6.5,4.5) G6(-5.5,4.5) G7(-4.5,4.5) G8(-3.5,4.5) G9(-2.5,4.5) G10(-1.5,4.5) G11(-0.5,4.5) G12(0.5,4.5) G13(1.5,4.5) G14(2.5,4.5) G15(3.5,4.5) G16(4.5,4.5) G17(5.5,4.5) G18(6.5,4.5) G19(7.5,4.5) G20(8.5,4.5) G21(9.5,4.5) G22(10.5,4.5) H1(-10.5,3.5) H2(-9.5,3.5) H3(-8.5,3.5) H4(-7.5,3.5) H5(-6.5,3.5) H6(-5.5,3.5) H7(-4.5,3.5) H8(-3.5,3.5) H9(-2.5,3.5) H10(-1.5,3.5) H11(-0.5,3.5) H12(0.5,3.5) H13(1.5,3.5) H14(2.5,3.5) H15(3.5,3.5) H16(4.5,3.5) H17(5.5,3.5) H18(6.5,3.5) H19(7.5,3.5) H20(8.5,3.5) H21(9.5,3.5) H22(10.5,3.5) J1(-10.5,2.5) J2(-9.5,2.5) J3(-8.5,2.5) J4(-7.5,2.5) J5(-6.5,2.5) J6(-5.5,2.5) J7(-4.5,2.5) J8(-3.5,2.5) J9(-2.5,2.5) J10(-1.5,2.5) J11(-0.5,2.5) J12(0.5,2.5) J13(1.5,2.5) J14(2.5,2.5) J15(3.5,2.5) J16(4.5,2.5) J17(5.5,2.5) J18(6.5,2.5) J19(7.5,2.5) J20(8.5,2.5) J21(9.5,2.5) J22(10.5,2.5) K1(-10.5,1.5) K2(-9.5,1.5) K3(-8.5,1.5) K4(-7.5,1.5) K5(-6.5,1.5) K6(-5.5,1.5) K7(-4.5,1.5) K8(-3.5,1.5) K9(-2.5,1.5) K10(-1.5,1.5) K11(-0.5,1.5) K12(0.5,1.5) K13(1.5,1.5) K14(2.5,1.5) K15(3.5,1.5) K16(4.5,1.5) K17(5.5,1.5) K18(6.5,1.5) K19(7.5,1.5) K20(8.5,1.5) K21(9.5,1.5) K22(10.5,1.5) L1(-10.5,0.5) L2(-9.5,0.5) L3(-8.5,0.5) L4(-7.5,0.5) L5(-6.5,0.5) L6(-5.5,0.5) L7(-4.5,0.5) L8(-3.5,0.5) L9(-2.5,0.5) L10(-1.5,0.5) L11(-0.5,0.5) L12(0.5,0.5) L13(1.5,0.5) L14(2.5,0.5) L15(3.5,0.5) L16(4.5,0.5) L17(5.5,0.5) L18(6.5,0.5) L19(7.5,0.5) L20(8.5,0.5) L21(9.5,0.5) L22(10.5,0.5) M1(-10.5,-0.5) M2(-9.5,-0.5) M3(-8.5,-0.5) M4(-7.5,-0.5) M5(-6.5,-0.5) M6(-5.5,-0.5) M7(-4.5,-0.5) M8(-3.5,-0.5) M9(-2.5,-0.5) M10(-1.5,-0.5) M11(-0.5,-0.5) M12(0.5,-0.5) M13(1.5,-0.5) M14(2.5,-0.5) M15(3.5,-0.5) M16(4.5,-0.5) M17(5.5,-0.5) M18(6.5,-0.5) M19(7.5,-0.5) M20(8.5,-0.5) M21(9.5,-0.5) M22(10.5,-0.5) N1(-10.5,-1.5) N2(-9.5,-1.5) N3(-8.5,-1.5) N4(-7.5,-1.5) N5(-6.5,-1.5) N6(-5.5,-1.5) N7(-4.5,-1.5) N8(-3.5,-1.5) N9(-2.5,-1.5) N10(-1.5,-1.5) N11(-0.5,-1.5) N12(0.5,-1.5) N13(1.5,-1.5) N14(2.5,-1.5) N15(3.5,-1.5) N16(4.5,-1.5) N17(5.5,-1.5) N18(6.5,-1.5) N19(7.5,-1.5) N20(8.5,-1.5) N21(9.5,-1.5) N22(10.5,-1.5) P1(-10.5,-2.5) P2(-9.5,-2.5) P3(-8.5,-2.5) P4(-7.5,-2.5) P5(-6.5,-2.5) P6(-5.5,-2.5) P7(-4.5,-2.5) P8(-3.5,-2.5) P9(-2.5,-2.5) P10(-1.5,-2.5) P11(-0.5,-2.5) P12(0.5,-2.5) P13(1.5,-2.5) P14(2.5,-2.5) P15(3.5,-2.5) P16(4.5,-2.5) P17(5.5,-2.5) P18(6.5,-2.5) P19(7.5,-2.5) P20(8.5,-2.5) P21(9.5,-2.5) P22(10.5,-2.5) R1(-10.5,-3.5) R2(-9.5,-3.5) R3(-8.5,-3.5) R4(-7.5,-3.5) R5(-6.5,-3.5) R6(-5.5,-3.5) R7(-4.5,-3.5) R8(-3.5,-3.5) R9(-2.5,-3.5) R10(-1.5,-3.5) R11(-0.5,-3.5) R12(0.5,-3.5) R13(1.5,-3.5) R14(2.5,-3.5) R15(3.5,-3.5) R16(4.5,-3.5) R17(5.5,-3.5) R18(6.5,-3.5) R19(7.5,-3.5) R20(8.5,-3.5) R21(9.5,-3.5) R22(10.5,-3.5) T1(-10.5,-4.5) T2(-9.5,-4.5) T3(-8.5,-4.5) T4(-7.5,-4.5) T5(-6.5,-4.5) T6(-5.5,-4.5) T7(-4.5,-4.5) T8(-3.5,-4.5) T9(-2.5,-4.5) T10(-1.5,-4.5) T11(-0.5,-4.5) T12(0.5,-4.5) T13(1.5,-4.5) T14(2.5,-4.5) T15(3.5,-4.5) T16(4.5,-4.5) T17(5.5,-4.5) T18(6.5,-4.5) T19(7.5,-4.5) T20(8.5,-4.5) T21(9.5,-4.5) T22(10.5,-4.5) U1(-10.5,-5.5) U2(-9.5,-5.5) U3(-8.5,-5.5) U4(-7.5,-5.5) U5(-6.5,-5.5) U6(-5.5,-5.5) U7(-4.5,-5.5) U8(-3.5,-5.5) U9(-2.5,-5.5) U10(-1.5,-5.5) U11(-0.5,-5.5) U12(0.5,-5.5) U13(1.5,-5.5) U14(2.5,-5.5) U15(3.5,-5.5) U16(4.5,-5.5) U17(5.5,-5.5) U18(6.5,-5.5) U19(7.5,-5.5) U20(8.5,-5.5) U21(9.5,-5.5) U22(10.5,-5.5) V1(-10.5,-6.5) V2(-9.5,-6.5) V3(-8.5,-6.5) V4(-7.5,-6.5) V5(-6.5,-6.5) V6(-5.5,-6.5) V7(-4.5,-6.5) V8(-3.5,-6.5) V9(-2.5,-6.5) V10(-1.5,-6.5) V11(-0.5,-6.5) V12(0.5,-6.5) V13(1.5,-6.5) V14(2.5,-6.5) V15(3.5,-6.5) V16(4.5,-6.5) V17(5.5,-6.5) V18(6.5,-6.5) V19(7.5,-6.5) V20(8.5,-6.5) V21(9.5,-6.5) V22(10.5,-6.5) W1(-10.5,-7.5) W2(-9.5,-7.5) W3(-8.5,-7.5) W4(-7.5,-7.5) W5(-6.5,-7.5) W6(-5.5,-7.5) W7(-4.5,-7.5) W8(-3.5,-7.5) W9(-2.5,-7.5) W10(-1.5,-7.5) W11(-0.5,-7.5) W12(0.5,-7.5) W13(1.5,-7.5) W14(2.5,-7.5) W15(3.5,-7.5) W16(4.5,-7.5) W17(5.5,-7.5) W18(6.5,-7.5) W19(7.5,-7.5) W20(8.5,-7.5) W21(9.5,-7.5) W22(10.5,-7.5) Y1(-10.5,-8.5) Y2(-9.5,-8.5) Y3(-8.5,-8.5) Y4(-7.5,-8.5) Y5(-6.5,-8.5) Y6(-5.5,-8.5) Y7(-4.5,-8.5) Y8(-3.5,-8.5) Y9(-2.5,-8.5) Y10(-1.5,-8.5) Y11(-0.5,-8.5) Y12(0.5,-8.5) Y13(1.5,-8.5) Y14(2.5,-8.5) Y15(3.5,-8.5) Y16(4.5,-8.5) Y17(5.5,-8.5) Y18(6.5,-8.5) Y19(7.5,-8.5) Y20(8.5,-8.5) Y21(9.5,-8.5) Y22(10.5,-8.5)
  silkscreen extent -12.27,-11.5 11.5,11.5, body extent -11.5,-11.5 11.5,11.5, height 2.6
HDR1X2 [mm] "Connector; Header; 2 Position"
  rect 1.5x1.5 hole 0.9: 1(0,0)
  round 1.5 hole 0.9: 2(2.54,0)
  silkscreen extent -1.27,-1.27 3.81,1.27
HDR2X5 [mm] "Connector; Header; 5x2 Position"
  rect 1.5x1.5 hole 0.9: 1(0,0)
  round 1.5 hole 0.9: 2(0,2.54) 3(2.54,0) 4(2.54,2.54) 5(5.08,0) 6(5.08,2.54) 7(7.62,0) 8(7.62,2.54) 9(10.16,0) 10(10.16,2.54)
  silkscreen extent -1.27,-1.27 11.43,3.81
HFJ11-1G01ERL [mm]
  round 3.3 hole 3.3: 0(-5.715,0) 0(5.715,0)
  round 1.6 hole 0.9: 1(-5.71,8.89) 2(-4.44,6.35) 3(-3.17,8.89) 4(-1.9,6.35) 5(-0.63,8.89) 6(0.64,6.35) 7(1.91,8.89) 8(3.18,6.35) 9(4.45,8.89) 10(5.72,6.35)
  round 2.5 hole 1.6: M1(-7.745,3.05) M2(7.745,3.05)
  silkscreen extent -7.94,-10.92 7.94,10.67
L5R2 [mm]
  rect 3x5 smd: 1(1.524,5.08) 2(11.176,5.08)
  silkscreen extent 0,0 12.7,10.16
LED5 [mil]
  round 60 hole 31.5: 1(0,0) 2(100,0)
  silkscreen extent -48,-98 148,98
LF56A_N [mm]
  rect 0.7x0.28 smd: 1(-3.9,3.25) 14(-3.9,-3.25) 29(3.9,-3.25) 42(3.9,3.25)
  rect 0.8x0.28 smd: 2(-3.85,2.75) 3(-3.85,2.25) 4(-3.85,1.75) 5(-3.85,1.25) 6(-3.85,0.75) 7(-3.85,0.25) 8(-3.85,-0.25) 9(-3.85,-0.75) 10(-3.85,-1.25) 11(-3.85,-1.75) 12(-3.85,-2.25) 13(-3.85,-2.75) 30(3.85,-2.75) 31(3.85,-2.25) 32(3.85,-1.75) 33(3.85,-1.25) 34(3.85,-0.75) 35(3.85,-0.25) 36(3.85,0.25) 37(3.85,0.75) 38(3.85,1.25) 39(3.85,1.75) 40(3.85,2.25) 41(3.85,2.75)
  rect 0.28x0.7 smd: 15(-3.25,-3.9) 28(3.25,-3.9) 43(3.25,3.9) 56(-3.25,3.9)
  rect 0.28x0.8 smd: 16(-2.75,-3.85) 17(-2.25,-3.85) 18(-1.75,-3.85) 19(-1.25,-3.85) 20(-0.75,-3.85) 21(-0.25,-3.85) 22(0.25,-3.85) 23(0.75,-3.85) 24(1.25,-3.85) 25(1.75,-3.85) 26(2.25,-3.85) 27(2.75,-3.85) 44(2.75,3.85) 45(2.25,3.85) 46(1.75,3.85) 47(1.25,3.85) 48(0.75,3.85) 49(0.25,3.85) 50(-0.25,3.85) 51(-0.75,3.85) 52(-1.25,3.85) 53(-1.75,3.85) 54(-2.25,3.85) 55(-2.75,3.85)
  rect 5.22x5.22 smd: 57(0,0)
  silkscreen extent -4.15,-4.15 4.15,4.15
M7 [mm]
  rect 2x2 smd: 1(0,0) 2(5.08,0)
  silkscreen extent -1.27,-1.52 6.48,1.52
OPT [mm]
  rect 1.5x1.5 hole 0.9: 1(3.81,1.27)
  round 1.5 hole 0.9: 2(1.27,1.27) 3(-1.27,1.27) 4(-3.81,1.27) 5(-3.81,-1.27) 6(-1.27,-1.27) 7(1.27,-1.27) 8(3.81,-1.27)
  silkscreen extent -6.35,-22.12 6.35,5.08
QFP65P1680X2280-100N [mm]
  oval 1.75x0.35 smd: 1(-8.025,9.425) 2(-8.025,8.775) 3(-8.025,8.125) 4(-8.025,7.475) 5(-8.025,6.825) 6(-8.025,6.175) 7(-8.025,5.525) 8(-8.025,4.875) 9(-8.025,4.225) 10(-8.025,3.575) 11(-8.025,2.925) 12(-8.025,2.275) 13(-8.025,1.625) 14(-8.025,0.975) 15(-8.025,0.325) 16(-8.025,-0.325) 17(-8.025,-0.975) 18(-8.025,-1.625) 19(-8.025,-2.275) 20(-8.025,-2.925) 21(-8.025,-3.575) 22(-8.025,-4.225) 23(-8.025,-4.875) 24(-8.025,-5.525) 25(-8.025,-6.175) 26(-8.025,-6.825) 27(-8.025,-7.475) 28(-8.025,-8.125) 29(-8.025,-8.775) 30(-8.025,-9.425) 51(8.025,-9.425) 52(8.025,-8.775) 53(8.025,-8.125) 54(8.025,-7.475) 55(8.025,-6.825) 56(8.025,-6.175) 57(8.025,-5.525) 58(8.025,-4.875) 59(8.025,-4.225) 60(8.025,-3.575) 61(8.025,-2.925) 62(8.025,-2.275) 63(8.025,-1.625) 64(8.025,-0.975) 65(8.025,-0.325) 66(8.025,0.325) 67(8.025,0.975) 68(8.025,1.625) 69(8.025,2.275) 70(8.025,2.925) 71(8.025,3.575) 72(8.025,4.225) 73(8.025,4.875) 74(8.025,5.525) 75(8.025,6.175) 76(8.025,6.825) 77(8.025,7.475) 78(8.025,8.125) 79(8.025,8.775) 80(8.025,9.425)
  oval 0.35x1.75 smd: 31(-6.175,-11.025) 32(-5.525,-11.025) 33(-4.875,-11.025) 34(-4.225,-11.025) 35(-3.575,-11.025) 36(-2.925,-11.025) 37(-2.275,-11.025) 38(-1.625,-11.025) 39(-0.975,-11.025) 40(-0.325,-11.025) 41(0.325,-11.025) 42(0.975,-11.025) 43(1.625,-11.025) 44(2.275,-11.025) 45(2.925,-11.025) 46(3.575,-11.025) 47(4.225,-11.025) 48(4.875,-11.025) 49(5.525,-11.025) 50(6.175,-11.025) 81(6.175,11.025) 82(5.525,11.025) 83(4.875,11.025) 84(4.225,11.025) 85(3.575,11.025) 86(2.925,11.025) 87(2.275,11.025) 88(1.625,11.025) 89(0.975,11.025) 90(0.325,11.025) 91(-0.325,11.025) 92(-0.975,11.025) 93(-1.625,11.025) 94(-2.275,11.025) 95(-2.925,11.025) 96(-3.575,11.025) 97(-4.225,11.025) 98(-4.875,11.025) 99(-5.525,11.025) 100(-6.175,11.025)
  silkscreen extent -8.15,-9.75 6.75,10.32, body extent -7,-10 7,10, height 3.05
RESETKEY [mm]
  rect 1.5x1.5 smd: 0(0,3.937) 0(5.969,0.127) 1(0,0.254) 2(5.969,3.937)
  silkscreen extent 0,0 5.97,4.06
RNS001 [mil]
  rect 32x51 smd: 1(-75,-59) 2(-25,-59) 3(25,-59) 4(75,-59) 5(75,59) 6(25,59) 7(-25,59) 8(-75,59)
  silkscreen extent -122,-61 100,25
SIP2X [mm]
  rect 1.524x2 hole 1: 1(0,0)
  oval 1.524x2 hole 1: 2(2.54,0)
  silkscreen extent -2.54,-2.54 5.08,3.05
SIP4X [mm]
  rect 1.524x2 hole 1: 1(0.02,0.006)
  oval 1.524x2 hole 1: 2(2.56,0.006) 3(5.1,0.006) 4(7.64,0.006)
  silkscreen extent -2.52,-2.53 10.18,3.05
SMD8XX [mm]
  rect 2.5x0.6 smd: 1(1.153,4.448) 2(1.153,3.198) 3(1.153,1.948) 4(1.153,0.698) 5(7.153,0.698) 6(7.153,1.948) 7(7.153,3.198) 8(7.153,4.448)
  silkscreen extent 2.93,0 5.34,5.08
SMD14X [mm]
  rect 2.5x0.6 smd: 1(0,0) 2(0,-1.27) 3(0,-2.54) 4(0,-3.81) 5(0,-5.08) 6(0,-6.35) 7(0,-7.62) 8(6.6,-7.62) 9(6.6,-6.35) 10(6.6,-5.08) 11(6.6,-3.81) 12(6.6,-2.54) 13(6.6,-1.27) 14(6.6,0)
  silkscreen extent 1.52,-8.25 5.08,0.64
SMD16XX [mil]
  rect 98.42x24 smd: 1(90,485) 2(90,435) 3(90,385) 4(90,335) 5(90,285) 6(90,235) 7(90,185) 8(90,135) 9(350,135) 10(350,185) 11(350,235) 12(350,285) 13(350,335) 14(350,385) 15(350,435) 16(350,485)
  silkscreen extent 145,105 295,510
so_8 [mm]
  rect 1.8x0.6 smd: 1(0,0)
  oval 1.8x0.6 smd: 2(0,-1.27) 3(0,-2.54) 4(0,-3.81) 5(5.188,-3.81) 6(5.188,-2.54) 7(5.188,-1.27) 8(5.188,0)
  silkscreen extent 1.32,-4.44 3.86,0.64
SOIC16 [mm]
  rect 0.6x2.25 smd: 1(0,0) 2(1.27,0) 3(2.54,0) 4(3.81,0) 5(5.08,0) 6(6.35,0) 7(7.62,0) 8(8.89,0) 9(8.89,9.15) 10(7.62,9.15) 11(6.35,9.15) 12(5.08,9.15) 13(3.81,9.15) 14(2.54,9.15) 15(1.27,9.15) 16(0,9.15)
  silkscreen extent -0.97,-0.12 9.72,7.63
SOP20 [mm]
  rect 1.5x0.3 smd: 1(0,0)
  oval 1.5x0.3 smd: 2(0,-0.65) 3(0,-1.3) 4(0,-1.95) 5(0,-2.6) 6(0,-3.25) 7(0,-3.9) 8(0,-4.55) 9(0,-5.2) 10(0,-5.85) 11(6.6,-5.85) 12(6.6,-5.2) 13(6.6,-4.55) 14(6.6,-3.9) 15(6.6,-3.25) 16(6.6,-2.6) 17(6.6,-1.95) 18(6.6,-1.3) 19(6.6,-0.65) 20(6.6,0)
  silkscreen extent 1.58,-6.18 5.02,0.33
SOT23-3L [mm] "SOT23, 3-Leads, Body 2.9x1.3mm, Pitch 0.95mm, Lead Span 2.5mm, IPC High Density"
  rect 1.2x0.6 smd: 1(-0.9,0.95) 2(-0.9,-0.95) 3(0.9,0)
  silkscreen extent -1.02,-1.5 0.7,1.92, body extent -0.7,-1.5 0.7,1.5, height 1.1
SOT-23-5 [mil]
  rect 24.19x51.75 smd: 1(0,-10) 2(38,-10) 3(75,-10) 4(75,85.75) 5(0,85.75)
  silkscreen extent -20,-50 100,120
SOT-143 [mil]
  rect 40x50 smd: 1(0,0)
  rect 30x50 smd: 2(70,0) 3(70,100) 4(-5,100)
  silkscreen extent -40,30 105,70
SQFP50P1720X2320-128L [mm] "Shrink QFP, 128-Leads, Body 20x14 mm, Pitch 0.5mm, IPC High Density"
  oval 1.55x0.25 smd: 1(-8.125,9.25) 2(-8.125,8.75) 3(-8.125,8.25) 4(-8.125,7.75) 5(-8.125,7.25) 6(-8.125,6.75) 7(-8.125,6.25) 8(-8.125,5.75) 9(-8.125,5.25) 10(-8.125,4.75) 11(-8.125,4.25) 12(-8.125,3.75) 13(-8.125,3.25) 14(-8.125,2.75) 15(-8.125,2.25) 16(-8.125,1.75) 17(-8.125,1.25) 18(-8.125,0.75) 19(-8.125,0.25) 20(-8.125,-0.25) 21(-8.125,-0.75) 22(-8.125,-1.25) 23(-8.125,-1.75) 24(-8.125,-2.25) 25(-8.125,-2.75) 26(-8.125,-3.25) 27(-8.125,-3.75) 28(-8.125,-4.25) 29(-8.125,-4.75) 30(-8.125,-5.25) 31(-8.125,-5.75) 32(-8.125,-6.25) 33(-8.125,-6.75) 34(-8.125,-7.25) 35(-8.125,-7.75) 36(-8.125,-8.25) 37(-8.125,-8.75) 38(-8.125,-9.25) 65(8.125,-9.25) 66(8.125,-8.75) 67(8.125,-8.25) 68(8.125,-7.75) 69(8.125,-7.25) 70(8.125,-6.75) 71(8.125,-6.25) 72(8.125,-5.75) 73(8.125,-5.25) 74(8.125,-4.75) 75(8.125,-4.25) 76(8.125,-3.75) 77(8.125,-3.25) 78(8.125,-2.75) 79(8.125,-2.25) 80(8.125,-1.75) 81(8.125,-1.25) 82(8.125,-0.75) 83(8.125,-0.25) 84(8.125,0.25) 85(8.125,0.75) 86(8.125,1.25) 87(8.125,1.75) 88(8.125,2.25) 89(8.125,2.75) 90(8.125,3.25) 91(8.125,3.75) 92(8.125,4.25) 93(8.125,4.75) 94(8.125,5.25) 95(8.125,5.75) 96(8.125,6.25) 97(8.125,6.75) 98(8.125,7.25) 99(8.125,7.75) 100(8.125,8.25) 101(8.125,8.75) 102(8.125,9.25)
  oval 0.25x1.55 smd: 39(-6.25,-11.125) 40(-5.75,-11.125) 41(-5.25,-11.125) 42(-4.75,-11.125) 43(-4.25,-11.125) 44(-3.75,-11.125) 45(-3.25,-11.125) 46(-2.75,-11.125) 47(-2.25,-11.125) 48(-1.75,-11.125) 49(-1.25,-11.125) 50(-0.75,-11.125) 51(-0.25,-11.125) 52(0.25,-11.125) 53(0.75,-11.125) 54(1.25,-11.125) 55(1.75,-11.125) 56(2.25,-11.125) 57(2.75,-11.125) 58(3.25,-11.125) 59(3.75,-11.125) 60(4.25,-11.125) 61(4.75,-11.125) 62(5.25,-11.125) 63(5.75,-11.125) 64(6.25,-11.125) 103(6.25,11.125) 104(5.75,11.125) 105(5.25,11.125) 106(4.75,11.125) 107(4.25,11.125) 108(3.75,11.125) 109(3.25,11.125) 110(2.75,11.125) 111(2.25,11.125) 112(1.75,11.125) 113(1.25,11.125) 114(0.75,11.125) 115(0.25,11.125) 116(-0.25,11.125) 117(-0.75,11.125) 118(-1.25,11.125) 119(-1.75,11.125) 120(-2.25,11.125) 121(-2.75,11.125) 122(-3.25,11.125) 123(-3.75,11.125) 124(-4.25,11.125) 125(-4.75,11.125) 126(-5.25,11.125) 127(-5.75,11.125) 128(-6.25,11.125)
  silkscreen extent -8.25,-9.95 6.95,10.05, body extent -7,-10 7,10, height 3
TLP821-1 [mm]
  rect 2x0.8 smd: 1(0,0) 2(0,-1.27) 3(6.985,-1.27) 4(6.985,0)
  silkscreen extent 1.4,-1.91 5.46,0.76
USB-B [mm]
  oval 1.8x1.524 hole 1: 1(7.27,4.71) 2(4.77,4.71) 3(4.77,2.71) 4(7.27,2.71)
  round 4 hole 2.3: 5(0,0) 6(12.04,0)
  silkscreen extent 0,-10.25 12.04,6.25

## Part data
C1 C2 C3 C4 C5 C6 C7 C8 C9 C10 C11 C12 C14 C15 C16 C17 C18 C19 C21 C22 C23 C24 C25 C26 C27 C28 C29 C31 C32 C33 C34 C35 C36 C37 C38 C40 C41 C42 C43 C44 C45 C46 C47 C48 C49 C50 C51 C52 C53 C54 C66 C71 C72 C73 C74 C75 C76 C77 C78 C79 C80 C81 C82 C83 C84 C85 C86 C87 C88 C89 C90 C91 C92 C93 C94 C95 C96 C97 C98 C99 C100 C101 C102 C103 C104 C105 C106 C107 C108 C109 C110 C111 C112 C113 C114 C115 C116 C117 C118 C119 C120 C121 C122 C123 C124 C125 C126 C127 C128 C129 C130 C131 C132 C133 C134 C135 C136 C137 C138 C139 C140 C141 C142 C143 C144 C145 C146 C147 C148 C149 C150 C151 C152 C153 C154 C158 C159 C160 C162 C163 C164 C165 C166 C167 C168 C169 C170 C171 C172 C173 C174 C175 C176 C177 C178 C179 C180 C181 C182 C183 C187 C188 C189 C190 C194 C195 C196 C199 R34: library part Cap, "Capacitor"
C13 C20 C30 C39 C156 C157 C185 C186 C192 C193 C197 C198: library part "Cap Pol2", "Polarized Capacitor (Axial)"
C55 C56 C57 C65 C67 C68 C69 C70: library part "Cap Semi", "Capacitor (Semiconductor SIM Model)"
C58 C59 C60 C61 C62 C63 C64 C155 C161 C184 C191 C200 C201 C202 C203 C204 C205 C206 C207: library part CAP, "Capacitor"
D1 D2 D3 D4 D5 D6 D10 D11 D12: library part LED0, "Typical INFRARED GaAs LED"
D7: "Typical INFRARED GaAs LED"
D8 D9: library part BAV99, "Silicon Switching Diode Array for High-Speed Switching"
D13: library part "DIODE TUNNEL", "Diode Tunnel"
J1: library part ETHERNET-RJ45
J2: library part "Header 6", "Header, 6-Pin"
J3: library part "Header 2", "Header, 2-Pin"
J4: library part "Header 5X2", "Header, 5-Pin, Dual row"
L1: library part "Inductor Iron", "Magnetic-Core Inductor"
L2 L3 L4 L5 L6 L7 L8 L9 L10 L11 L12 L13: library part Inductor, "Inductor"
L14 L15 L16: library part INDUCTOR1
LT1: library part LAMP
N1 N2: library part OPA
N3 N4: library part TLP521-1
O1 O2: library part OPTO
R1 R2 R3 R4 R5 R6 R7 R8 R9 R10 R11 R12 R13 R14 R15 R16 R17 R18 R19 R20 R21 R22 R23 R24 R25 R26 R27 R28 R29 R30 R31 R32 R33 R35 R36 R37 R38 R39 R40 R41 R42 R43 R44 R45 R46 R47 R48 R49 R50 R51 R52 R53 R54 R55 R56 R57 R58 R59 R60 R61 R62 R63 R73 R77 R78 R80 R81 R83 R84 R85 R88 R89 R90 R92 R93 R94 R95 R96 R110 R111 R112 R113 R114 R115 R116 R117 R118 R119 R120: library part Res2, "Resistor"
R64 R65 R97 R98 R99 R100 R101 R102 R103 R104 R105 R106 R107 R108 R109: library part RES2
R66 R67 R68 R69 R70 R71 R72 R74 R75 R76 R79 R82 R86 R87: library part Res3, "Resistor"
R91: library part Resistor
S1 S2: library part SW-PB
S3 S4: library part "SW DIP-4", "DIP Switch, 4 Position, SPST"
U1: "Spartan-6 LX 1.2V FPGA, 316 User I/Os, 484-Ball Fine-Pitch BGA (1.0mm Pitch), Speed Grade 3, Industrial Grade, Pb-Free"
U2 Y3: library part Component_1
U3: "EZ-USB FX2LP USB Microcontroller Ideal for Battery Powered Applications,16K RAM, 24 I/Os, 56-Pin QFN, Pb-Free, Commercial Grade"
U4: library part MAX811-EUS-T, "4-Pin 礟 Voltage Monitors with Manual Reset Input"
U5: library part 24LC02B-I/SN, "2Kbit, 400kHz, 2.5V, I2C Serial EEPROM, 8-Pin SOIC 150mil, Industrial Temperature"
U6: library part "SPI FLASH 128Mb S25FL128P", "SPI FLASH 128Mbit, 104MHz, 64kB sector"
U7 U11: "Quadruple 2-Input Positive-NAND Gate"
U8 U12: library part HFBR-1414
U13 U14: library part MAX998ESA, "Single, SOT23, Single-Supply, High-Speed, Low-Power Comparator"
U17: library part GS880Z18BT100
U18 U19: library part TPS54312, "TPS54312"
U21: library part LT1962EMS8, "300mA, Low Noise, Micropower Low Dropout Regulator"
X1 X2: library part CON4, "Connector"
X3 X4: "Header, 2-Pin"
Y1 Y2: library part XTAL, "Crystal Oscillator"

## Free pads (board coordinates)
  round 1.524 hole 0.762: 0(25.708,45.75) 0(55.731,90.174) 0(104.194,34.802) 0(123.625,57.789) 1(41.379,43.997) 1(90.554,28.681) 1(132.921,57.713) 2(28.172,46.766) 2(28.223,39.07) 2(71.429,16.329) 2(123.244,21.798) 3(39.602,46.69) 3(57.89,6.151) 3(132.566,21.213) 4(28.324,33.913) 4(62.004,90.149) 4(74.577,20.07) 5(25.733,66.324) 5(59.769,83.418) 5(93.45,14.559) 6(21.796,87.05) 6(25.505,69.804) 6(95.939,16.88) 7(39.627,36.428) 7(82.242,16.438) 7(86.185,90.454) 8(39.627,33.913) 8(94.618,90.428) 9(28.476,55.63) 9(32.134,55.63) 9(83.772,29.214) 9(92.586,83.824) 10(28.476,57.205) 10(32.134,57.205) 10(71.122,23.862) 10(80.216,29.214) 11(12.297,76.712) 11(15.566,76.992) 11(28.476,58.755) 11(32.134,58.755) 11(94.085,28.656) 12(12.297,75.29) 12(15.566,75.569) 13(12.297,73.944) 13(15.566,74.223) 15(98.86,24.363) 16(90.554,31.983) 17(94.186,31.932) 18(19.485,82.377) 19(54.13,85.425) 20(86.947,85.729) 21(44.986,91.063) 22(19.51,85.958) 23(80.089,90.55) 24(113.998,90.779)
  round 4 hole 3: 1(2.5,2.5) 1(2.5,97.1) 1(18,70) 1(18,90) 1(46.233,34.712) 1(46.233,64.712) 1(50,70) 1(50,90) 1(78.233,34.712) 1(78.233,64.712) 1(148.5,2.5) 1(148.5,97.1)
  round 1.2 smd: 4(9.219,97.975) 4(142,2)
  round 2 hole 1: 12(20.879,92.735)
  round 1 hole 0.5: 14(78.975,76.499) 14(83.276,78.603) 14(87.43,48.696) 14(90.653,78.579) 14(93.353,56.321) 14(104.397,48.493) 14(112.169,24.769) 14(112.695,76.263) 14(114.125,31.932) 14(114.397,74.383) 14(114.402,75.374) 14(114.423,76.364)

## Via types
v1: diameter 0.483, hole 0.254, Top Layer to Bottom Layer, 652 vias

## Nets (pads, with @x,y where several pads share a name; then routed paths per layer and width w, separated by ;. In a path a pad name is that pad's centre, name@x,y a point inside that pad or via, vN(x,y) a via of type N, cw(c..) or ccw(c..) an arc to the next point about the centre after c; other vN are vias at no path point)
125CLK: R119.2 U1.D11 | length 12.9
  Top Layer w0.254: U1.D11@62.733,42.212 v1(63.233,41.712)
  Bottom Layer w0.254: R119.2@59.464,32.006 R119.2@59.461,32.002 60.982,32.002 61.738,32.758 61.738,40.217 v1(63.233,41.712)
A0: U1.P5 U17.37 | length 33.6
  Top Layer w0.203: U17.37@95.953,59.874 v1(95.953,61.168)
  Top Layer w0.254: U1.P5@68.733,52.212 v1(69.233,52.712)
  Mid-Layer 2 w0.203: v1(69.233,52.712) 69.233,53.048 69.703,53.518 69.703,53.847 70.038,54.182 70.367,54.182 70.703,54.518 70.703,54.847 71.038,55.182 73.367,55.182 73.703,55.518 73.703,55.543 77.803,59.644 95.456,59.644 95.964,60.152 95.964,61.244 95.953,61.233 v1(95.953,61.168)
A1: U1.P6 U17.36 | length 36.3
  Top Layer w0.203: U17.36@96.603,59.874 v1(96.603,61.904)
  Top Layer w0.254: U1.P6@67.733,52.212 v1(68.233,52.712)
  Mid-Layer 2 w0.203: v1(68.233,52.712) 68.233,53.048 68.763,53.578 68.763,53.907 69.099,54.242 69.428,54.242 69.763,54.578 69.763,54.907 70.099,55.242 70.428,55.242 70.703,55.518 70.703,55.847 71.099,56.242 73.792,56.242 77.79,60.24 94.859,60.24 95.202,60.583 95.202,61.549 95.558,61.904 v1(96.603,61.904)
A2: U1.N1 U17.35 | length 29.4
  Top Layer w0.203: U17.35@97.253,59.874 97.26,59.867 v1(97.26,57.662)
  Top Layer w0.254: U1.N1@72.733,51.212 v1(73.233,51.712)
  Mid-Layer 2 w0.203: v1(73.233,51.712) 73.656,51.712 79.505,57.561 97.209,57.561 97.26,57.612 v1(97.26,57.662)